# Altium PCB F_300.PcbDoc (part 1 of 3)
Units mil, origin at the board's own origin, x right, y up, seen from the top; angles counter-clockwise.
Board outline 3770 x 3800 mil, 4 copper layers (Top Layer, DGND, VCC, Bottom Layer), stack 30.634 mil thick; 207 components, 290 nets, 1124 pads, 648 vias.
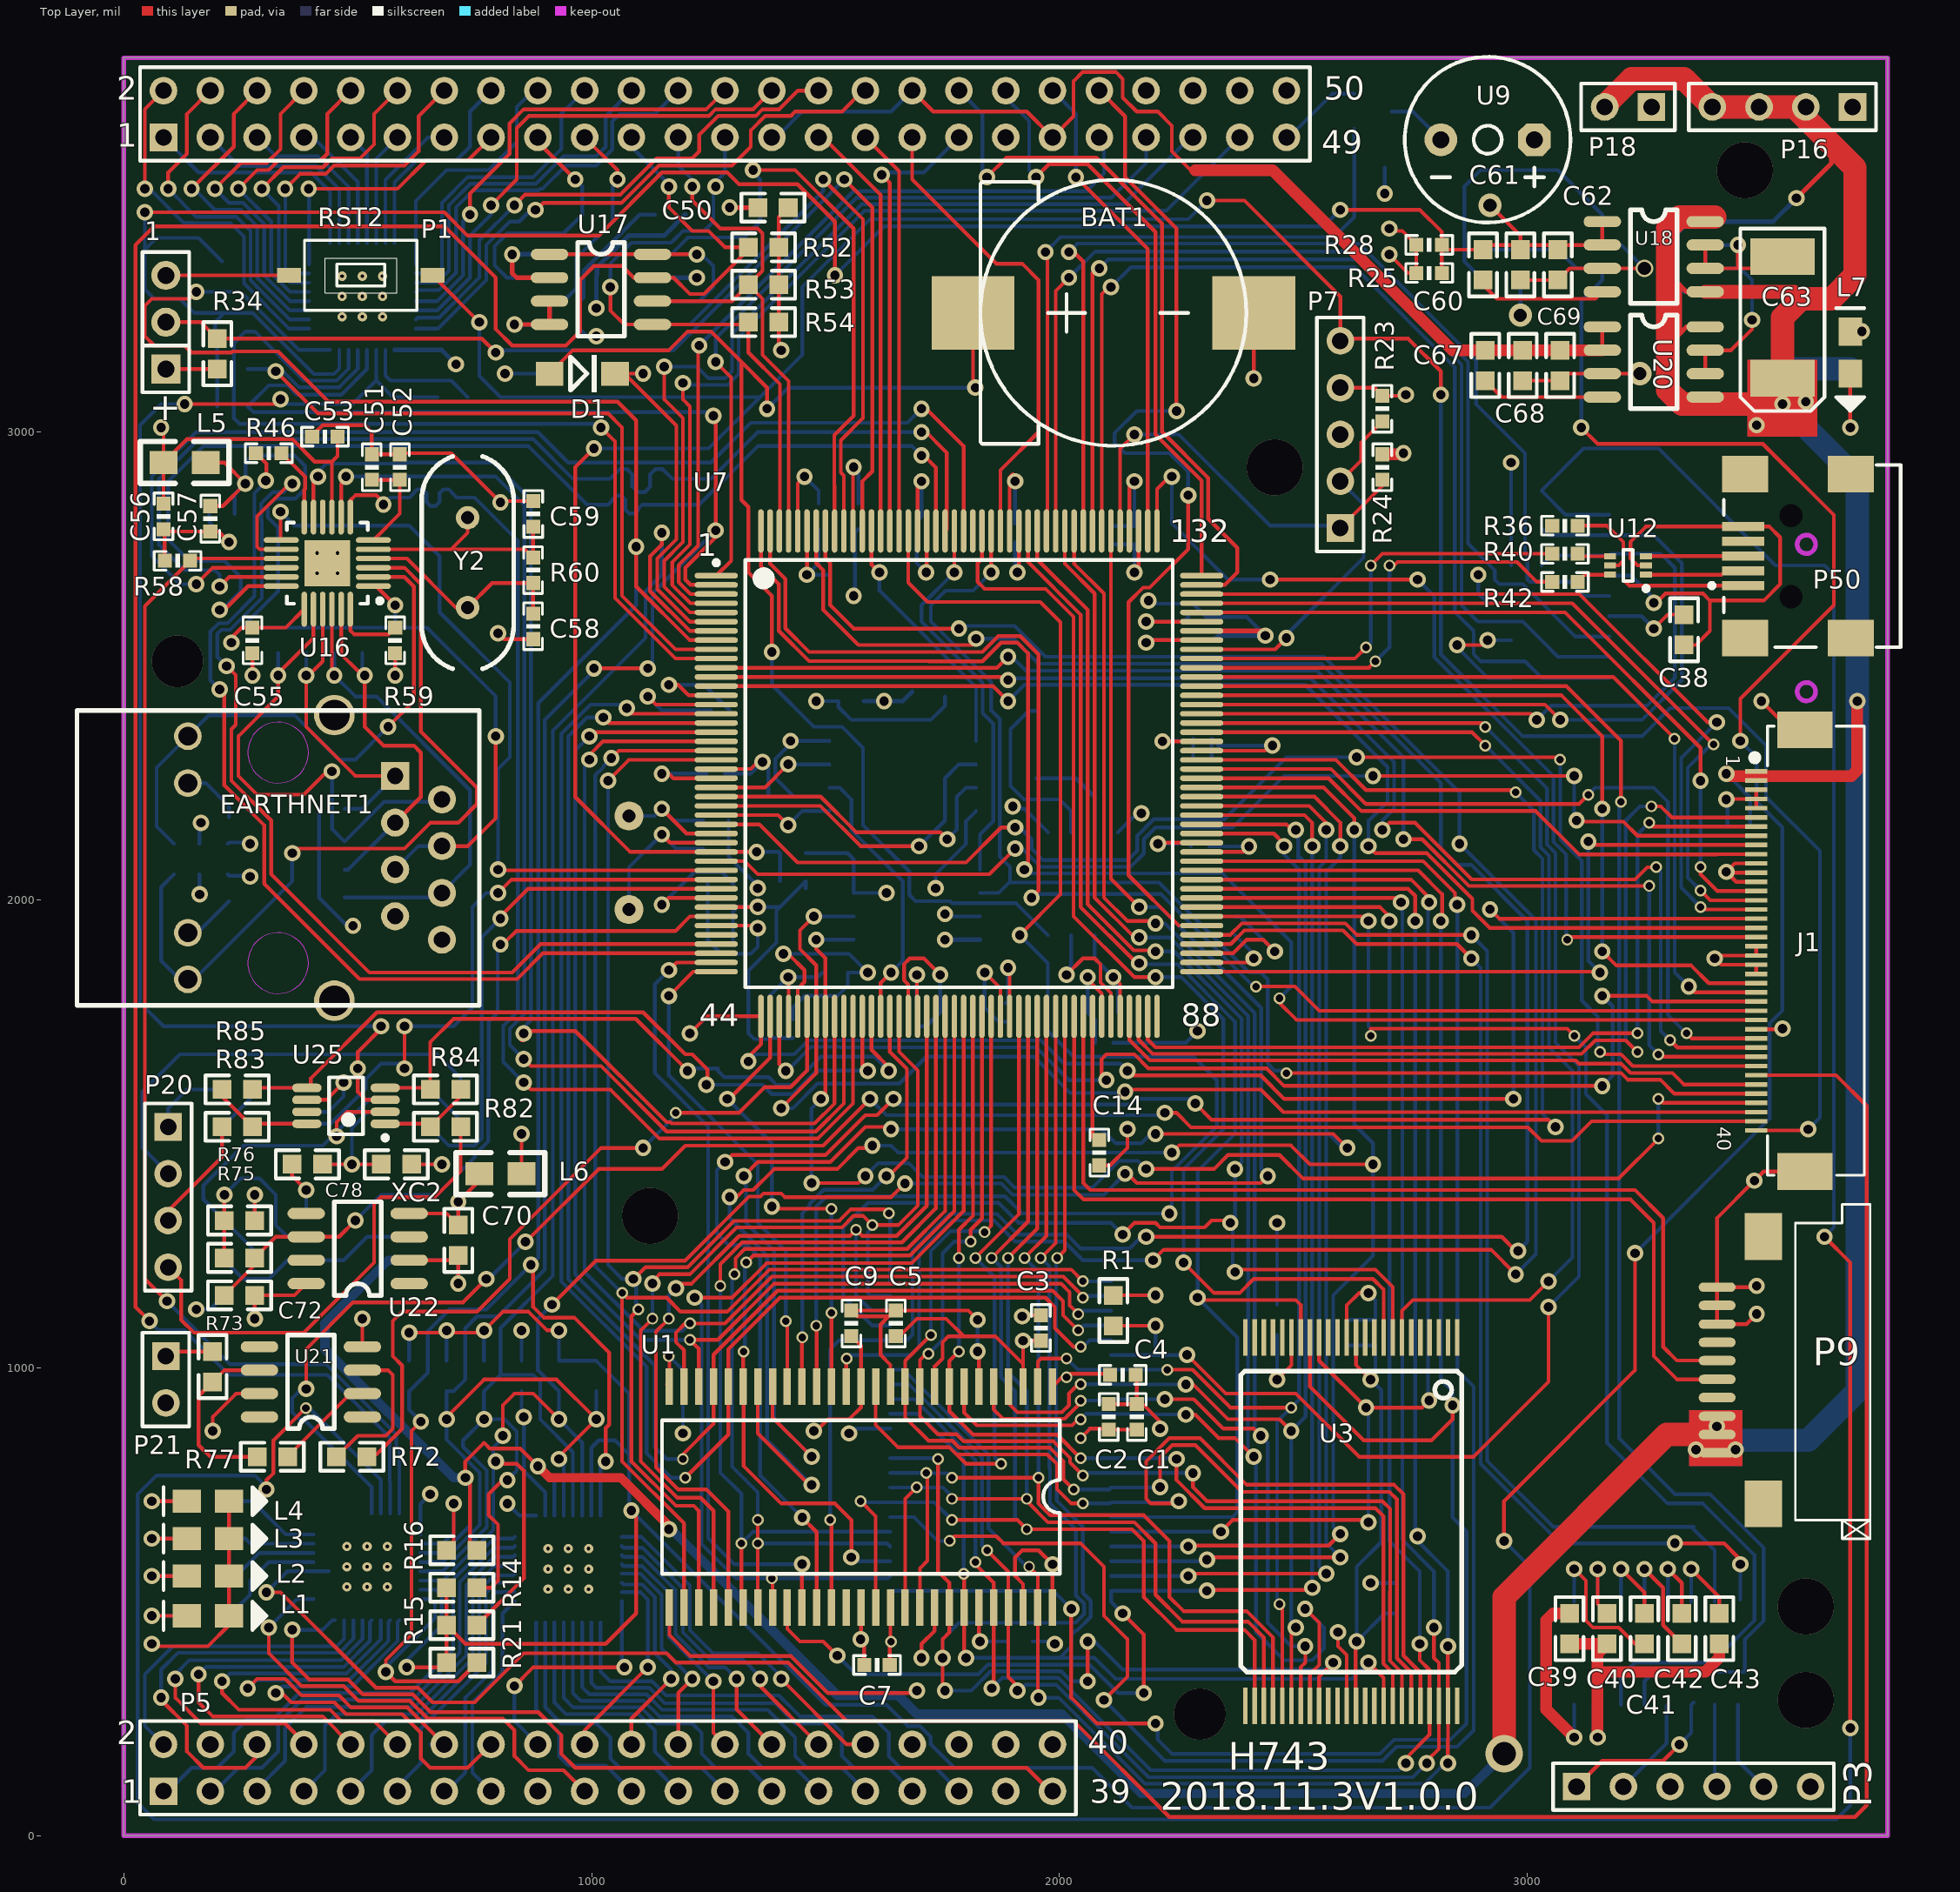
[diagram p0: Top Layer view]
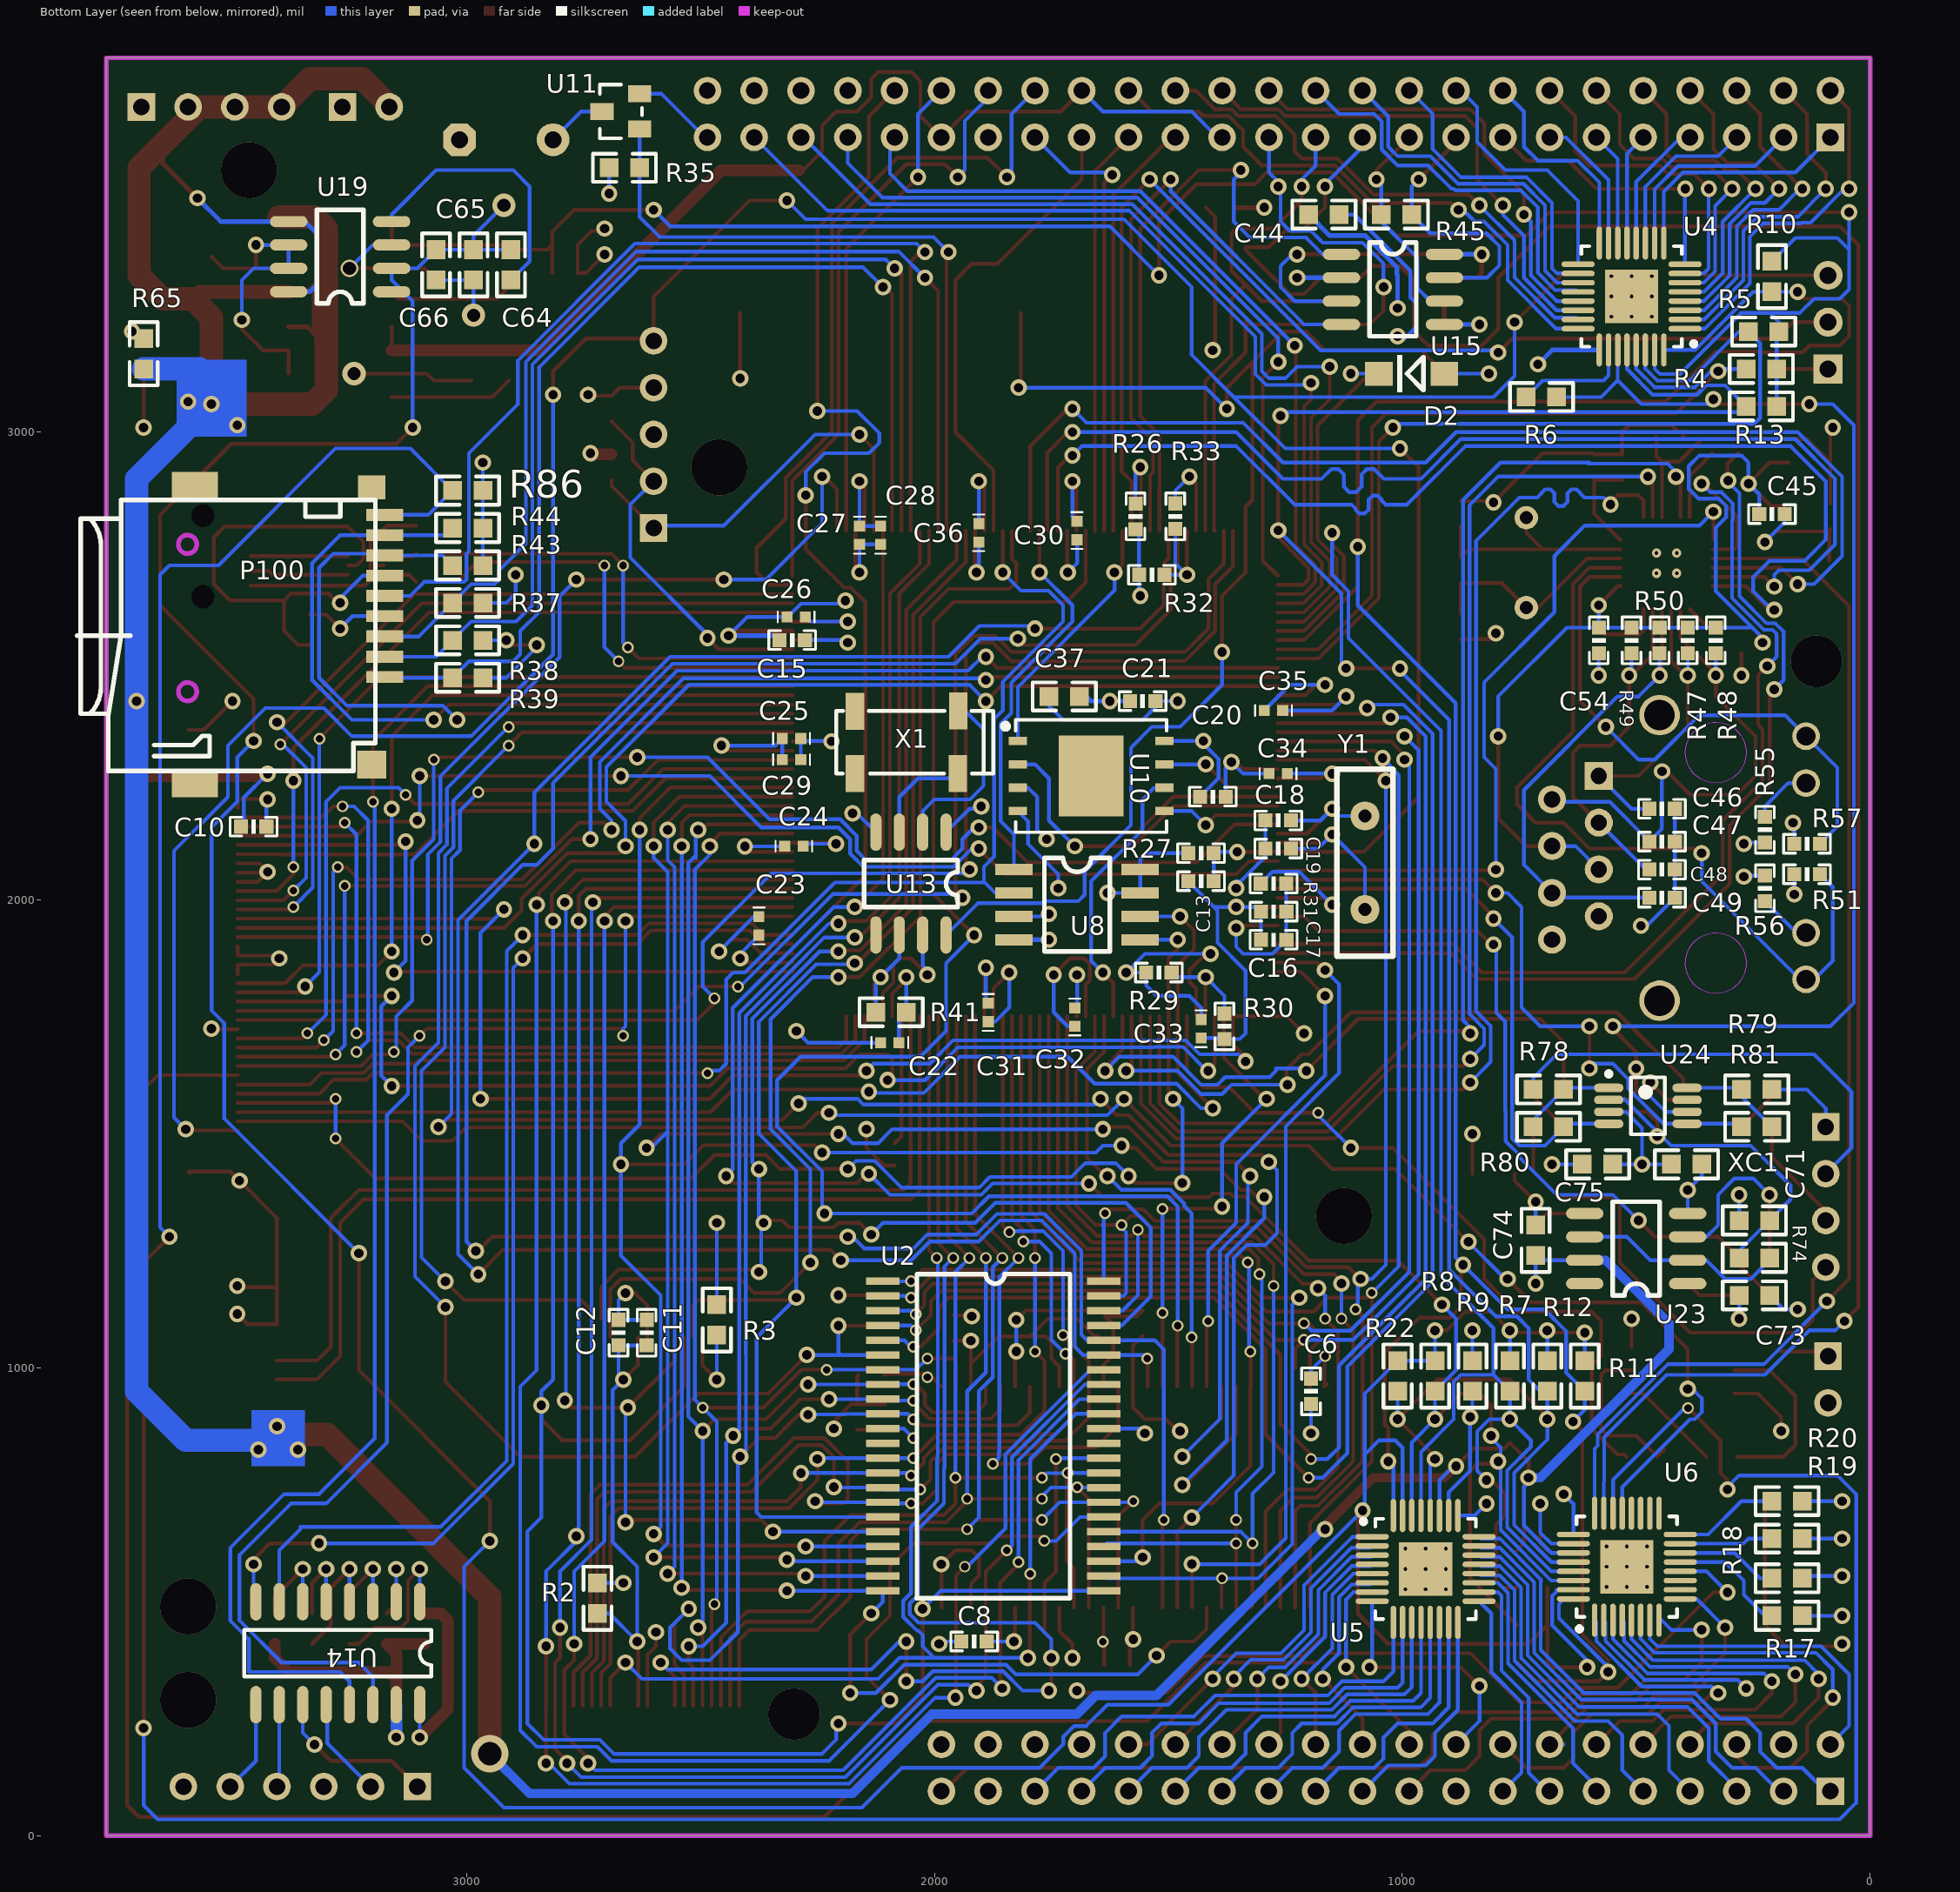
[diagram p1: Bottom Layer view, seen from below]
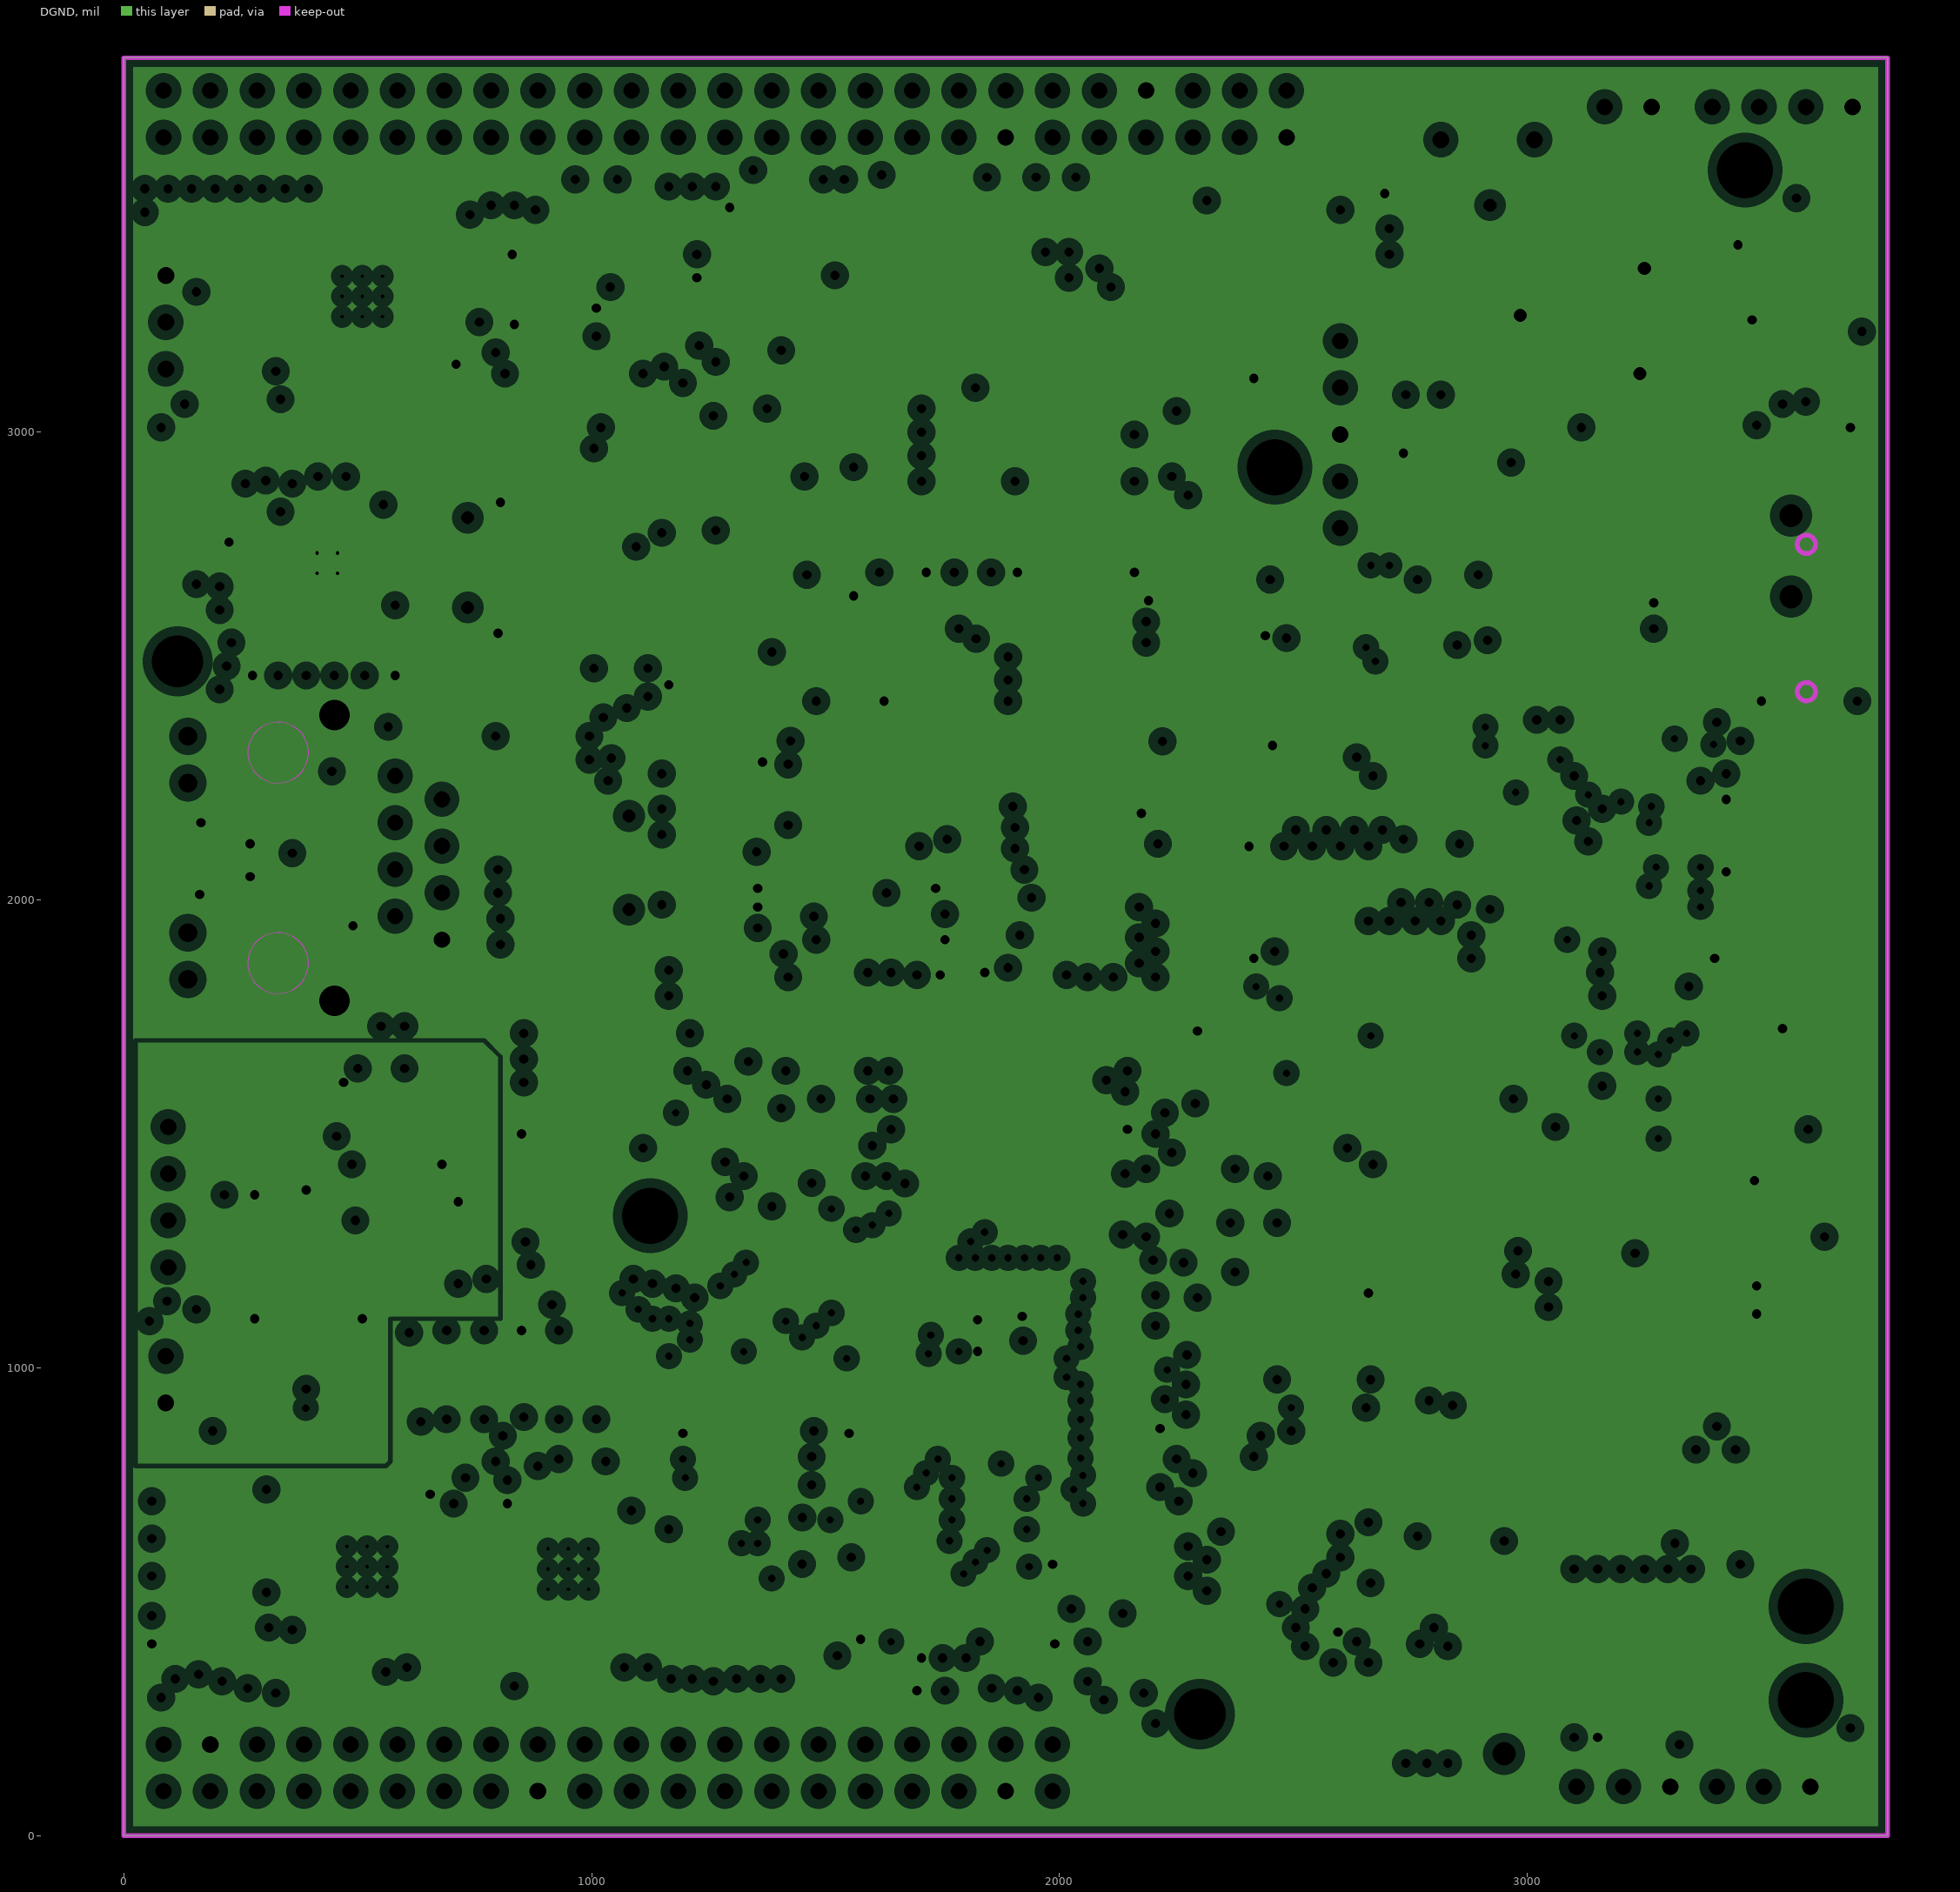
[diagram p2: DGND, clearances drawn from the general rule]
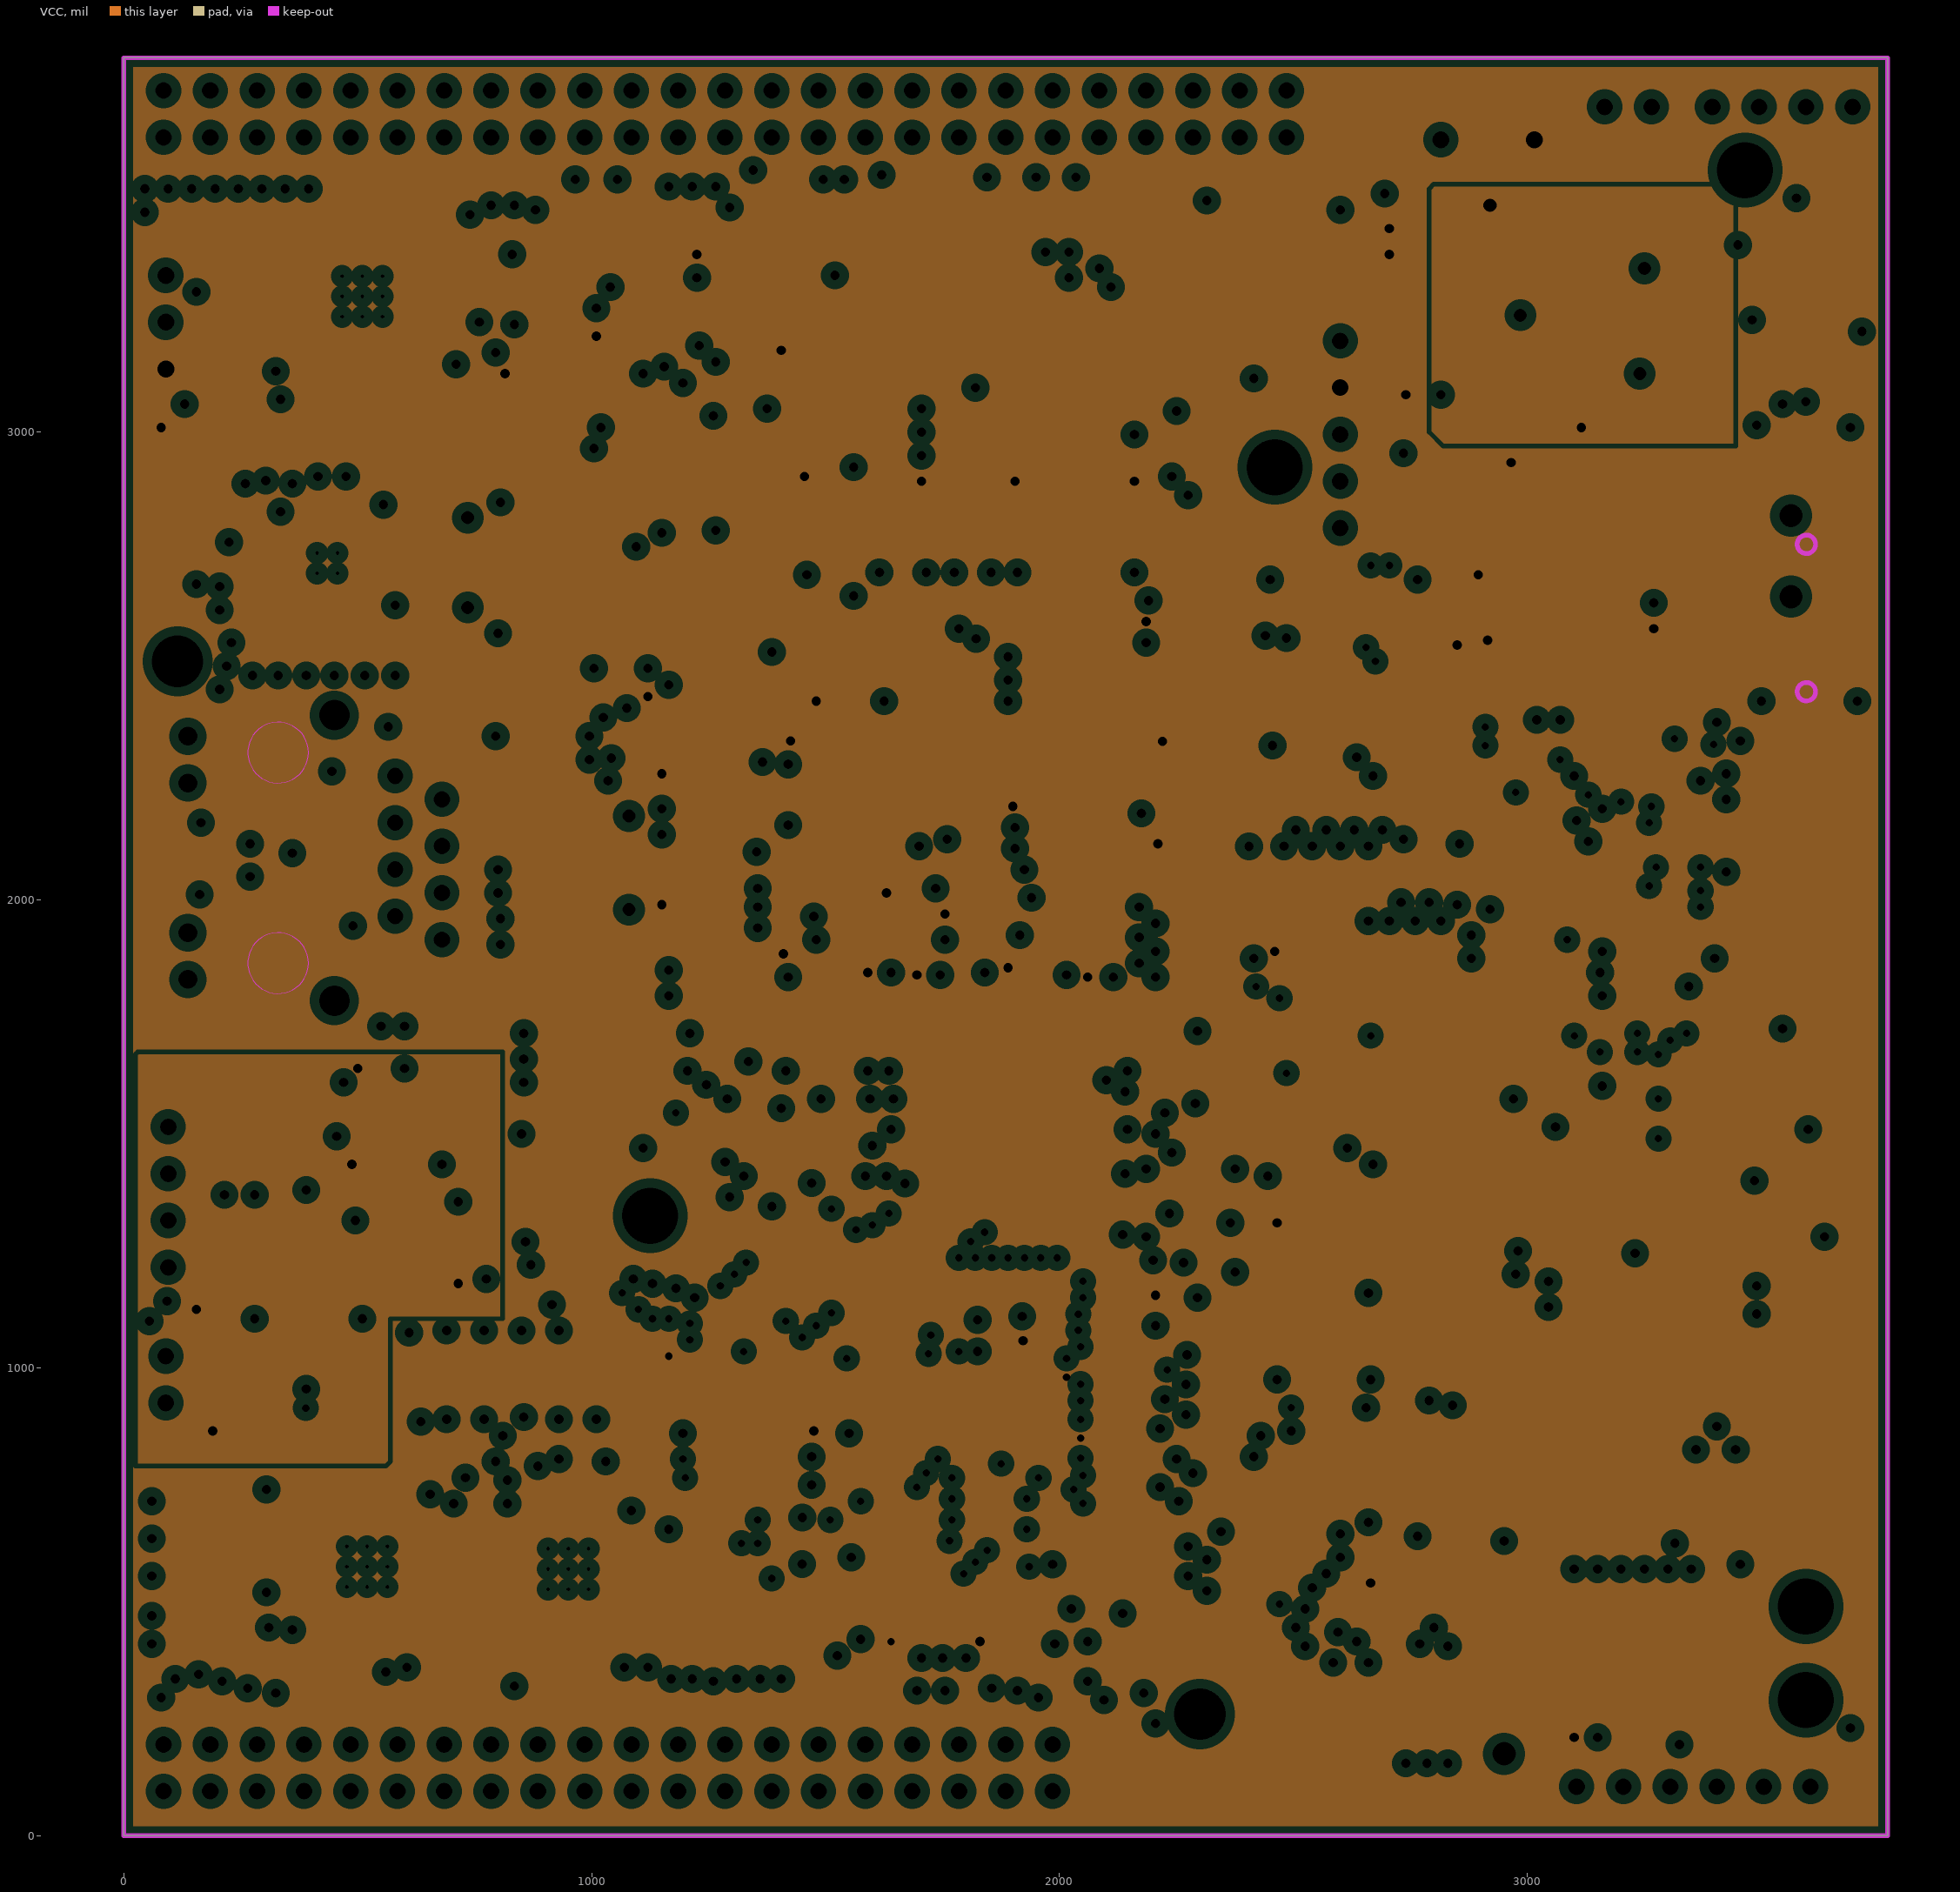
[diagram p3: VCC, clearances drawn from the general rule]

## Layer stack, top to bottom
Top Solder: solder mask 0.4, Solder Resist, Dk 3.5
Top Layer: signal copper 1.4
Dielectric 1: core 10, FR-4, Dk 4.2
DGND: plane copper 1.417, net (Multiple Nets)
Dielectric 2: core 10, Dk 4.2
VCC: plane copper 1.417, net (Multiple Nets)
Dielectric 3: prepreg 5, Dk 4.2
Bottom Layer: signal copper 1.4
Bottom Solder: solder mask 0.4, Solder Resist, Dk 3.5

## Board outline
0,0 0,3800 3770,3800 3770,0

## Design rules (kind name [scope] priority, off if disabled: settings)
Clearance [All] p1: gap=6 ignorepadtopadclearanceinfootprint=FALSE except(0: Arc-Hole Track-Hole SMDPad-Hole THPad-Hole Via-Hole Fill-Hole Poly-Hole Region-Hole Text-Hole)
DiffPairsRouting [All] p1: maxlimit=10 minlimit=10 mostfreqgap=10 toplayer_minwidth=10 toplayer_maxwidth=15 toplayer_prefwidth=15 bottomlayer_minwidth=10 bottomlayer_maxwidth=15 bottomlayer_prefwidth=15 maxuncoupledlength=500
HoleToHoleClearance [All] p1: gap=4 allowstackedmicrovias=TRUE
Length "InNet('PC4') Or InNet('PG13')" [InNet('PC4') Or InNet('PG13')] p1: maxlimit=2800 minlimit=0
Length "InNet('PG14') Or InNet('PG13')" [InNet('PG14') Or InNet('PG13')] p2: maxlimit=2458.94 minlimit=0
MinimumSolderMaskSliver [All] p1: minsoldermaskwidth=0
PlaneClearance [All] p1: clearance=20
PlaneConnect [All] p1: planeconnectstyle=Relief reliefexpansion=20 reliefentries=4 reliefconductorwidth=10 reliefairgap=10
PolygonConnect [All] p1: connectstyle=Relief reliefconductorwidth=10 reliefentries=4 polygonreliefangle="90 Angle" airgapwidth=10
RoutingVias [All] p1: holewidth=28 width=50 viastyle="Through Hole" minholewidth=15 minwidth=20 maxholewidth=28 maxwidth=50
SilkToSilkClearance [All] p1: silktosilkclearance=0
SilkToSolderMaskClearance [IsPad] p1: minsilkscreentomaskgap=0 clearancetoexposedcopper=TRUE
SolderMaskExpansion [All] p1: expansion=4
Width [All] p1: maxlimit=50 minlimit=8 preferedwidth=10 minimp=50.000000 maximp=50.000000 favimp=50.000000
23 further rules are at their usual default settings.

## Classes and differential pairs
net class "New Class 1": PC4 PC5
net class "New Class": PG13 PG14
component class Power: C60 C61 C62 C63 C64 C65 C66 C67 C68 C69 C70 C71 C72 C73 C74 C75 C78 L6 L7 P16 P18 P20 P21 R65 R72 R73 R74 R75 R76 R77 R78 R79 R80 R81 R82 R83 R84 R85 U18 U19 U20 U21 U22 U23 U24 U25 XC1 XC2
component class MCU_Per: BAT1 C37 C38 C39 C40 C41 C42 C43 C44 C45 C46 C47 C48 C49 C50 C51 C52 C53 C54 C55 C56 C57 C58 C59 EARTHNET1 L5 P3 P9 P50 P100 P? R36 R37 R38 R39 R40 R41 R42 R43 R44 R45 R46 R47 R48 R49 R50 R51 R52 R53 R54 R55 R56 R57 R58 R59 R60 R86 U12 U13 U14 U15 U16 U17 X1 Y2
component class MCU_H: 1 C13 C14 C15 C16 C17 C18 C19 C20 C21 C22 C23 C24 C25 C26 C27 C28 C29 C30 C31 C32 C33 C34 C35 C36 D1 D2 P7 R23 R24 R25 R26 R27 R28 R29 R30 R31 R32 R33 R34 R35 RST2 U7 U8 U9 U10 U11 Y1
component class IO_IIC: L1 L2 L3 L4 P1 P5 R4 R5 R6 R7 R8 R9 R10 R11 R12 R13 R14 R15 R16 R17 R18 R19 R20 R21 R22 U4 U5 U6
component class FLASH_SRAM: C1 C2 C3 C4 C5 C6 C7 C8 C9 C10 C11 C12 J1 R1 R2 R3 U1 U2 U3

## Components (designator, comment, footprint, x,y, rotation, side; value= is the part's Value field where it differs from the comment)
1 "CON3" SIP3 90,3135 r90 top
BAT1 "BAT3.6V" BAT 1815,3255 r0 top
C1 "0.1uF" 0603P 2165,895 r90 top
C2 "0.1uF" 0603P 2105,895 r90 top
C3 "0.1uF" 0603P 1960,1085 r90 top
C4 "0.1uF" 0603P 2135,985 r0 top
C5 "0.1uF" 0603P 1650,1095 r90 top
C6 "0.1uF" 0603P 1195,950 r270 bottom
C7 "0.1uF" 0603P 1610,365 r180 top
C8 "0.1uF" 0603P 1915,415 r0 bottom
C9 "0.1uF" 0603P 1555,1095 r90 top
C10 "0.1uF" 0603P 3455,2156.89 r180 bottom
C11 "0.1uF" 0603P 2615,1075 r90 bottom
C12 "0.1uF" 0603P 2675,1075 r90 bottom
C13 "0.1uF" 0603P 1430,2040 r0 bottom
C14 "0.1uF" 0603P 2085,1460 r270 top
C15 "0.1uF" 0603P 2303.7,2555.43 r0 bottom
C16 "10uF" 0603P 1275,1915 r180 bottom
C17 "0.1uF" 0603P 1275,1975 r180 bottom
C18 "8pF" 0603P 1265,2170 r0 bottom
C19 "8pF" 0603P 1265,2110 r0 bottom
C20 "0.1uF" 0603P 1405,2220.79 r180 bottom
C21 "0.1uF" 0603P 1555,2425 r180 bottom
C22 "0.1uF" 0402 2115,1695 r180 bottom
C23 "0.1uF" 0402 2375,1925 r90 bottom
C24 "0.1uF" 0402 2320,2115 r180 bottom
C25 "0.1uF" 0402 2325,2345 r180 bottom
C26 "0.1uF" 0402 2315,2605 r180 bottom
C27 "0.1uF" 0402 2160,2760 r90 bottom
C28 "0.1uF" 0402 2115,2760 r90 bottom
C29 "0.1uF" 0402 2325,2300 r180 bottom
C30 "0.1uF" 0402 1695,2770 r90 bottom
C31 "0.1uF" 0402 1885,1740 r90 bottom
C32 "0.1uF" 0402 1700,1730 r90 bottom
C33 "0.1uF" 0402 1430,1705 r90 bottom
C34 "0.1uF" 0402 1285,2270 r180 bottom
C35 "0.1uF" 0402 1295,2405 r180 bottom
C36 "0.1uF" 0402 1905,2765 r90 bottom
C37 "104" 0603 1690,2435 r0 bottom
C38 "104" 0603 3335,2545 r90 top
C39 "104" 0603 3090,410 r90 top
C40 "104" 0603 3170,410 r90 top
C41 "104" 0603 3250,410 r90 top
C42 "104" 0603 3330,410 r90 top
C43 "104" 0603 3410,475 r270 top
C44 "0.1uF" 0603 1200,3465 r180 bottom
C45 "223" 0603P 210,2825 r180 bottom
C46 "0.1uf" 0603P 445,2195 r180 bottom
C47 "0.1uf" 0603P 445,2125 r180 bottom
C48 "0.1uf" 0603P 445,2065 r180 bottom
C49 "0.1uf" 0603P 445,2005 r180 bottom
C50 "104" 0603 1420,3480 r180 top
C51 "0.1uf" 0603P 530,2925 r90 top
C52 "10uf" 0603P 590,2925 r90 top
C53 "0.1uf" 0603P 430,2990 r180 top
C54 "0.1uf" 0603P 579.87,2555 r270 bottom
C55 "0.1uf" 0603P 275,2555 r270 top
C56 "223" 0603P 85,2820 r270 top
C57 "223" 0603P 185,2815 r270 top
C58 "22pF" 0603P 875,2585 r270 top
C59 "22pF" 0603P 875,2825 r90 top
C60 "103" 0603 2905,3390 r270 top
C61 "10uF" 0603 2985,3390 r270 top
C62 "104" 0603 3065,3390 r270 top
C63 "100uF" 100UF/25V_CA 3545,3115 r90 top
C64 "103" 0603 2905,3390 r270 bottom
C65 "10uF" 0603 2985,3390 r270 bottom
C66 "104" 0603 3065,3390 r270 bottom
C67 "103" 0603 2910,3175 r270 top
C68 "10uF" 0603 2990,3175 r270 top
C69 "104" 0603 3070,3175 r270 top
C70 "10uF" 0603 715,1240 r90 top
C71 "104" 0603 215,1315 r0 bottom
C72 "104" 0603 280,1155 r180 top
C73 "10uF" 0603 280,1155 r180 bottom
C74 "104" 0603 715,1305 r270 bottom
C75 "0.1uF" 0603 615,1435 r180 bottom
C78 "0.1uF" 0603 360,1435 r0 top
D1 "1N4148" DIODE_SOP 910,3125 r0 top
D2 "1N4148" DIODE_SOP 910,3125 r0 bottom
EARTHNET1 "HR911105" HR911105A 330,2090 r90 top
J1 "RGBLCD" FPC-TOP40 3485,2275 r270 top
L1 "LED" 0805LED 135,470 r0 top
L2 "LED" 0805LED 135,555 r0 top
L3 "LED" 0805LED 135,635 r0 top
L4 "LED" 0805LED 135,715 r0 top
L5 "Inductor" 0805 85,2935 r0 top
L6 "Inductor" 0805 760,1415 r0 top
L7 "LED" 0805LED 3690,3215 r270 top
P1 "Header 25X2" HDR2X25 85,3630 r0 top
P3 "Header 13" HDR1X6 3105,105 r0 top
P5 "Header 20X2" HDR2X20 85,95 r0 top
P7 "JTAG" HDR1X5 2600,2795 r90 top
P9 "Header 10" PCBComponent_1 3455,995 r90 top
P16 "Header 4" HDR1X4 3695,3695 r180 top
P18 "Header 2" HDR1X2 3265,3695 r180 top
P20 "Header 4" HDR1X4 95,1515 r270 top
P21 "Header 2" HDR1X2 90,1025 r270 top
P50 "USB-B(Mini)" USB/SM0.8-6H5 3770,2735 r0 top
P100 "Header 13" SD-SMT 3175,2476.69 r90 bottom
R1 "390" 0603 2115,1090 r90 top
R2 "0R" 0603 2720,540 r270 bottom
R3 "10k" 0603 2465,1135 r270 bottom
R4 "1K" 0603 265,3135 r180 bottom
R5 "1K" 0603 260,3215 r180 bottom
R6 "1K" 0603 735,3075 r180 bottom
R7 "1K" 0603 770,950 r90 bottom
R8 "1K" 0603 930,950 r90 bottom
R9 "1K" 0603 850,950 r90 bottom
R10 "1K" 0603 210,3300 r90 bottom
R11 "1K" 0603 610,950 r90 bottom
R12 "1K" 0603 690,950 r90 bottom
R13 "1K" 0603 200,3055 r0 bottom
R14 "1K" 0603 755,530 r180 top
R15 "1K" 0603 755,450 r180 top
R16 "1K" 0603 690,610 r0 top
R17 "1K" 0603 145,470 r0 bottom
R18 "1K" 0603 145,550 r0 bottom
R19 "1K" 0603 145,635 r0 bottom
R20 "1K" 0603 145,715 r0 bottom
R21 "1K" 0603 755,370 r180 top
R22 "1K" 0603 1010,950 r90 bottom
R23 "10k" 0603P 2690,3050 r90 top
R24 "10k" 0603P 2690,2925 r90 top
R25 "0R" 0603P 2790,3340 r180 top
R26 "10k" 0603P 1570,2820 r270 bottom
R27 "10k" 0603P 1430,2100 r0 bottom
R28 "0R" 0603P 2790,3400 r180 top
R29 "10k" 0603P 1520,1845 r0 bottom
R30 "10k" 0603P 1380,1730 r270 bottom
R31 "10" 0603P 1275,2035 r0 bottom
R32 "0R" 0603P 1535,2695 r0 bottom
R33 "0R" 0603P 1485,2820 r90 bottom
R34 "5.1K" 0603 200,3200 r270 top
R35 "1M" 0603 2695,3565 r180 bottom
R36 "0R" 0603P 3080,2800 r0 top
R37 "100k" 0603 2965,2635 r0 bottom
R38 "100k" 0603 2965,2555 r0 bottom
R39 "100k" 0603 2965,2475 r0 bottom
R40 "10K" 0603P 3080,2740 r0 top
R41 "5.1K" 0603 2125,1760 r180 bottom
R42 "10K" 0603P 3080,2680 r0 top
R43 "100k" 0603 3030,2715 r180 bottom
R44 "100k" 0603 3030,2795 r180 bottom
R45 "120R" 0603 980,3465 r0 bottom
R46 "510R" 0603P 310,2955 r180 top
R47 "49.9R" 0603P 390,2555 r270 bottom
R48 "49.9R" 0603P 330,2555 r270 bottom
R49 "49.9R" 0603P 510,2555 r270 bottom
R50 "49.9R" 0603P 450,2555 r270 bottom
R51 "49.9R" 0603P 135,2055 r180 bottom
R52 "5.1K" 0603 1335,3395 r0 top
R53 "5.1K" 0603 1335,3315 r0 top
R54 "5.1K" 0603 1335,3235 r0 top
R55 "510R" 0603P 225,2150 r90 bottom
R56 "510R" 0603P 225,2025 r270 bottom
R57 "49.9R" 0603P 135,2120 r180 bottom
R58 "10k" 0603P 115,2725 r180 top
R59 "12.1k" 0603P 580,2555 r270 top
R60 "1M" 0603P 875,2705 r270 top
R65 "5.1K" 0603 3690,3135 r90 bottom
R72 "1K" 0603 455,810 r0 top
R73 "1K" 0603 190,1035 r270 top
R74 "1k0.1" 0603 215,1235 r0 bottom
R75 "1k0.1" 0603 280,1235 r180 top
R76 "1k0.1" 0603 280,1315 r180 top
R77 "0R" 0603 285,810 r0 top
R78 "1k0.1" 0603 655,1595 r0 bottom
R79 "1k0.1" 0603 275,1595 r180 bottom
R80 "1k0.1" 0603 655,1515 r0 bottom
R81 "1k0.1" 0603 210,1515 r0 bottom
R82 "1k0.1" 0603 655,1515 r0 top
R83 "1k0.1" 0603 275,1515 r180 top
R84 "1k0.1" 0603 655,1595 r0 top
R85 "1k0.1" 0603 210,1595 r0 top
R86 "100k" 0603 3030,2875 r180 bottom
RST2 "KEY_M" KEY_SOP3625 660,3335 r180 top
U1 "W9825G6KH" TSOP54 1985,960 r270 top
U2 "IS62WV51216" TSOP44 2110,1185 r180 bottom
U3 "MT29F4G08" TSOP48 2850,1065 r270 top
U4 "TCA6424ARGJR" TCA6424A-QFN32 1880,4660 r0 bottom
U5 "TCA6424ARGJR" TCA6424A-QFN32 -420,-800 r180 bottom
U6 "TCA6424ARGJR" TCA6424A-QFN32 -850,1945 r90 bottom
U7 "STM32H743IIT6" STM32h743IIGT-NEW-LQFN-176N 1785,2270 r0 top
U8 "W25X16" SOIC-8 1830,2065 r180 bottom
U9 "BZ" BZ_SMALL 2915,3625 r90 top
U10 "W25Q256" WSON8 1665,2265 r180 bottom
U11 "SI2306" SOT-23 2710,3685 r90 bottom
U12 "NUF2042XV6" NUF2042XV6 3215,2715 r180 top
U13 "DS1302" SO-8 1975,2145 r270 bottom
U14 "MAX3232" SO-16 3100,500 r270 bottom
U15 "MAX3051" SO-8 1130,3380 r180 bottom
U16 "LAN8720A" LAN7820A-QFN24 435,2720 r180 top
U17 "FM24C64" SO-8 910,3380 r0 top
U18 "LTC1763" SO-8 3160,3450 r0 top
U19 "LTC1763" SO-8 3160,3300 r0 bottom
U20 "LTC1763" SO-8 3160,3225 r0 top
U21 "OP177" SO-8 510,895 r180 top
U22 "AD780" SO-8 610,1180 r180 top
U23 "OP177" SO-8 390,1180 r0 bottom
U24 "LTC6362" LT6350XIN 475,1560 r180 bottom
U25 "LTC6362" LT6350XIN 475,1560 r180 top
X1 "32K" XTAL-2 1950,2270 r0 bottom
XC1 "10uF" 0603 425,1435 r180 bottom
XC2 "10uF" 0603 550,1435 r0 top
Y1 "XTAL" XTAL1 1080,2180 r270 bottom
Y2 "25MHz" XTAL_US 735,2625 r90 top

## Footprints (in the part's own frame and the unit in brackets; to place one, negate y for a bottom-side part, rotate by r counter-clockwise, add the part's x,y. Pads: shape width x height; smd on the part's side, far side on the other; paste and mask are expansions set on the pad)
100UF/25V_CA [mm]
  rect 2x3.5 smd: 1(0,0) 2(6.604,0)
  silkscreen extent -1.78,-2.29 8.13,2.29
0402 [mm]
  rect 0.6x0.6 smd: 1(0,0) 2(1,0)
  silkscreen extent -0.5,-0.3 1.5,0.3
0603 [mil]
  rect 40x40 smd: 1(0,0) 2(65,0)
  silkscreen extent -35,-30 100,30
0603P [mil]
  rect 30x30 smd: 1(-27,0) 2(27.5,-0.06)
  silkscreen extent -50,-20 50,20
0805 [mil]
  rect 60x50 smd: 1(0,0) 2(90,0)
  silkscreen extent -50,-45 140,45
0805LED [mil]
  rect 60x50 smd: 1(0,0) 2(90,0)
  silkscreen extent -50,-30 170,30
BAT [mm]
  rect 4.5x4 smd: 1(0,0) 2(15.24,0)
  silkscreen extent 0.4,-7.22 14.84,7.22
BZ_SMALL [mil]
  oct 70x70 hole 36: 1(0,-100)
  round 70 hole 36: 2(0,100)
  silkscreen extent -177,-177 177,177
DIODE_SOP [mm]
  rect 1.5x1.3 smd: 1(0,0) 2(3.556,0)
  silkscreen extent 1.14,-1.02 2.56,1.02
FPC-TOP40 [mm]
  rect 0.25x1.2 smd: 1(0,0.102) 2(0.5,0.102) 3(1,0.102) 4(1.5,0.102) 5(2,0.102) 6(2.5,0.102) 7(3,0.102) 8(3.5,0.102) 9(4,0.102) 10(4.5,0.102) 11(5,0.102) 12(5.5,0.102) 13(6,0.102) 14(6.5,0.102) 15(7,0.102) 16(7.5,0.102) 17(8,0.102) 18(8.5,0.102) 19(9,0.102) 20(9.5,0.102) 21(10,0.102) 22(10.5,0.102) 23(11,0.102) 24(11.5,0.102) 25(12,0.102) 26(12.5,0.102) 27(13,0.102) 28(13.5,0.102) 29(14,0.102) 30(14.5,0.102) 31(15,0.102) 32(15.5,0.102) 33(16,0.102) 34(16.5,0.102) 35(17,0.102) 36(17.5,0.102) 37(18,0.102) 38(18.5,0.102) 39(19,0.102) 40(19.5,0.102)
  rect 2x3 smd: A(-2.25,2.754) B(21.725,2.754)
  silkscreen extent -2.45,-0.15 21.92,5.97
HDR1X2 [mm] "Connector; Header; 2 Position"
  rect 1.5x1.5 hole 0.9: 1(0,0)
  round 1.5 hole 0.9: 2(2.54,0)
  silkscreen extent -1.27,-1.27 3.81,1.27
HDR1X4 [mm] "Connector; Header; 4 Position"
  rect 1.5x1.5 hole 0.9: 1(0,0)
  round 1.5 hole 0.9: 2(2.54,0) 3(5.08,0) 4(7.62,0)
  silkscreen extent -1.27,-1.27 8.89,1.27
HDR1X5 [mm] "Connector; Header; 5 Position"
  rect 1.5x1.5 hole 0.9: 1(0,0)
  round 1.5 hole 0.9: 2(2.54,0) 3(5.08,0) 4(7.62,0) 5(10.16,0)
  silkscreen extent -1.27,-1.27 11.43,1.27
HDR1X6 [mm] "Connector; Header; 6 Position"
  rect 1.5x1.5 hole 0.9: 1(0,0)
  round 1.5 hole 0.9: 2(2.54,0) 3(5.08,0) 4(7.62,0) 5(10.16,0) 6(12.7,0)
  silkscreen extent -1.27,-1.27 13.97,1.27
HDR2X20 [mm] "Connector; Header; 20x2 Position"
  rect 1.5x1.5 hole 0.9: 1(0,0)
  round 1.5 hole 0.9: 2(0,2.54) 3(2.54,0) 4(2.54,2.54) 5(5.08,0) 6(5.08,2.54) 7(7.62,0) 8(7.62,2.54) 9(10.16,0) 10(10.16,2.54) 11(12.7,0) 12(12.7,2.54) 13(15.24,0) 14(15.24,2.54) 15(17.78,0) 16(17.78,2.54) 17(20.32,0) 18(20.32,2.54) 19(22.86,0) 20(22.86,2.54) 21(25.4,0) 22(25.4,2.54) 23(27.94,0) 24(27.94,2.54) 25(30.48,0) 26(30.48,2.54) 27(33.02,0) 28(33.02,2.54) 29(35.56,0) 30(35.56,2.54) 31(38.1,0) 32(38.1,2.54) 33(40.64,0) 34(40.64,2.54) 35(43.18,0) 36(43.18,2.54) 37(45.72,0) 38(45.72,2.54) 39(48.26,0) 40(48.26,2.54)
  silkscreen extent -1.27,-1.27 49.53,3.81
HDR2X25 [mm] "Connector; Header; 25x2 Position"
  rect 1.5x1.5 hole 0.9: 1(0,0)
  round 1.5 hole 0.9: 2(0,2.54) 3(2.54,0) 4(2.54,2.54) 5(5.08,0) 6(5.08,2.54) 7(7.62,0) 8(7.62,2.54) 9(10.16,0) 10(10.16,2.54) 11(12.7,0) 12(12.7,2.54) 13(15.24,0) 14(15.24,2.54) 15(17.78,0) 16(17.78,2.54) 17(20.32,0) 18(20.32,2.54) 19(22.86,0) 20(22.86,2.54) 21(25.4,0) 22(25.4,2.54) 23(27.94,0) 24(27.94,2.54) 25(30.48,0) 26(30.48,2.54) 27(33.02,0) 28(33.02,2.54) 29(35.56,0) 30(35.56,2.54) 31(38.1,0) 32(38.1,2.54) 33(40.64,0) 34(40.64,2.54) 35(43.18,0) 36(43.18,2.54) 37(45.72,0) 38(45.72,2.54) 39(48.26,0) 40(48.26,2.54) 41(50.8,0) 42(50.8,2.54) 43(53.34,0) 44(53.34,2.54) 45(55.88,0) 46(55.88,2.54) 47(58.42,0) 48(58.42,2.54) 49(60.96,0) 50(60.96,2.54)
  silkscreen extent -1.27,-1.27 62.23,3.81
HR911105A [mm]
  rect 1.524x1.524 hole 0.889: 1(4.45,-6.35)
  round 1.524 hole 0.889: 2(3.18,-8.89) 3(1.91,-6.35) 4(0.64,-8.89) 5(-0.63,-6.35) 6(-1.9,-8.89) 7(-3.17,-6.35) 8(-4.44,-8.89)
  round 1.5 hole 1.02: 9(6.6,4.9) 10(4.064,4.9) 11(-4.064,4.9) 12(-6.6,4.9)
  round 2.2 hole 1.65: 13(7.75,-3.048) 14(-7.75,-3.048)
  Keep-Out Layer circle w0.051: c5.716,0 r1.65
  Keep-Out Layer circle w0.051: c-5.714,0 r1.65
  silkscreen extent -8,-10.92 8,10.92
KEY_SOP3625 [mm]
  rect 1.3x0.8 smd: 1(0,0) 2(7.8,0)
  silkscreen extent 0.85,-1.9 6.95,1.9
LAN7820A-QFN24 [mm] "QFN, 24-Leads, Body 4.00x4.00mm, Pitch 0.50mm, Thermal Pad 2.50x2.50mm, IPC Medium Density"
  oval 1.9x0.3 smd: 1(-2.5,1.25) 2(-2.5,0.75) 3(-2.5,0.25) 4(-2.5,-0.25) 5(-2.5,-0.75) 6(-2.5,-1.25) 13(2.5,-1.25) 14(2.5,-0.75) 15(2.5,-0.25) 16(2.5,0.25) 17(2.5,0.75) 18(2.5,1.25)
  oval 0.3x1.9 smd: 7(-1.25,-2.5) 8(-0.75,-2.5) 9(-0.25,-2.5) 10(0.25,-2.5) 11(0.75,-2.5) 12(1.25,-2.5) 19(1.25,2.5) 20(0.75,2.5) 21(0.25,2.5) 22(-0.25,2.5) 23(-0.75,2.5) 24(-1.25,2.5)
  rect 2.5x2.5 smd: 25(0,0)
  silkscreen extent -2.98,-2.2 2.2,2.2, body extent -2.05,-2.05 2.05,2.05, height 0.85
LT6350XIN [mm] "TSOP, 8-Leads, Body 3.00x3.00mm, Pitch 0.65mm, IPC Medium Density"
  oval 1.6x0.46 smd: 1(-2.125,0.975) 3(-2.125,-0.325) 4(-2.125,-0.975) 5(2.125,-0.975) 6(2.125,-0.325) 7(2.125,0.325) 8(2.125,0.975)
  oval 1.6x0.462 smd: 2(-2.125,0.325)
  silkscreen extent -2.25,-1.55 0.92,1.86, body extent -1.55,-1.55 1.55,1.55, height 1.1
NUF2042XV6 [mm] "SOT23, 6-Leads, Body 1.60x1.65mm, Pitch 0.50mm, IPC Medium Density"
  rect 0.65x0.32 smd: 1(-0.975,0.5) 2(-0.975,0) 3(-0.975,-0.5) 4(0.975,-0.5) 5(0.975,0) 6(0.975,0.5)
  silkscreen extent -1.1,-0.85 0.25,1.37, body extent -0.65,-0.85 0.65,0.85, height 0.6
PCBComponent_1 [mil]
  rect 100x80 smd: 0(-285.5,-49.5) 0(285.5,-49.5)
  oval 20x79 smd: 1(-176.5,49.5) 2(-137.5,49.5) 3(-98.5,49.5) 4(-58.5,49.5) 5(-19.5,49.5) 6(20.5,49.5) 7(59.5,49.5) 8(98.5,49.5) 9(138.5,49.5) 10(177.5,49.5)
  silkscreen extent -360,-278 354,-117
SD-SMT [mm]
  rect 0.65x2 smd: 1(0,0) 2(1.1,0) 3(2.2,0) 4(3.3,0) 5(4.4,0) 6(5.5,0) 7(6.6,0) 8(7.7,0) 9(8.8,0)
  rect 1.3x1.5 smd: 10(10.3,0.7)
  rect 1.5x2.5 smd: 11(10.37,10.3) 12(-5.77,10.3)
  rect 1.5x1.6 smd: 13(-4.76,0.7)
  Keep-Out Layer circle w0.254: c-0.8,10.7 r0.5
  Keep-Out Layer circle w0.254: c7.2,10.7 r0.5
  silkscreen extent -5.1,0.5 9.6,16.7
SIP3 [mil]
  rect 62x62 hole 36: 1(0,0)
  round 62 hole 36: 2(100,0) 3(200,0)
  silkscreen extent -50,-50 250,50
SO-8 [mil]
  oval 80x24 smd: 1(0,0) 2(0,-50) 3(0,-100) 4(0,-150) 5(220,-150) 6(220,-100) 7(220,-50) 8(220,0)
  silkscreen extent 60,-175 160,25
SO-16 [mil]
  oval 80x24 smd: 1(0,0) 2(0,-50) 3(0,-100) 4(0,-150) 5(0,-200) 6(0,-250) 7(0,-300) 8(0,-350) 9(220,-350) 10(220,-300) 11(220,-250) 12(220,-200) 13(220,-150) 14(220,-100) 15(220,-50) 16(220,0)
  silkscreen extent 60,-375 160,25
SOIC-8 [mil]
  rect 80x24 smd: 1(0,0) 2(0,-50.06) 3(0,-100.06) 4(0,-150.06) 5(270,-150) 6(270,-100) 7(270,-50) 8(270,0)
  silkscreen extent 65,-175 205,25
SOT-23 [mil]
  rect 36x50 smd: B(-37,-80) C(0,0) E(38,-80)
  silkscreen extent -57,-85 58,5
STM32h743IIGT-NEW-LQFN-176N [mm] "TSQFP, 176-Leads, Body 24.00x24.00mm, Pitch 0.50mm, IPC Medium Density"
  oval 2.35x0.3 smd: 1(-13.175,10.75) 2(-13.175,10.25) 3(-13.175,9.75) 4(-13.175,9.25) 5(-13.175,8.75) 6(-13.175,8.25) 7(-13.175,7.75) 8(-13.175,7.25) 9(-13.175,6.75) 10(-13.175,6.25) 11(-13.175,5.75) 12(-13.175,5.25) 13(-13.175,4.75) 14(-13.175,4.25) 15(-13.175,3.75) 16(-13.175,3.25) 17(-13.175,2.75) 18(-13.175,2.25) 19(-13.175,1.75) 20(-13.175,1.25) 21(-13.175,0.75) 22(-13.175,0.25) 23(-13.175,-0.25) 24(-13.175,-0.75) 25(-13.175,-1.25) 26(-13.175,-1.75) 27(-13.175,-2.25) 28(-13.175,-2.75) 29(-13.175,-3.25) 30(-13.175,-3.75) 31(-13.175,-4.25) 32(-13.175,-4.75) 33(-13.175,-5.25) 34(-13.175,-5.75) 35(-13.175,-6.25) 36(-13.175,-6.75) 37(-13.175,-7.25) 38(-13.175,-7.75) 39(-13.175,-8.25) 40(-13.175,-8.75) 41(-13.175,-9.25) 42(-13.175,-9.75) 43(-13.175,-10.25) 44(-13.175,-10.75) 89(13.175,-10.75) 90(13.175,-10.25) 91(13.175,-9.75) 92(13.175,-9.25) 93(13.175,-8.75) 94(13.175,-8.25) 95(13.175,-7.75) 96(13.175,-7.25) 97(13.175,-6.75) 98(13.175,-6.25) 99(13.175,-5.75) 100(13.175,-5.25) 101(13.175,-4.75) 102(13.175,-4.25) 103(13.175,-3.75) 104(13.175,-3.25) 105(13.175,-2.75) 106(13.175,-2.25) 107(13.175,-1.75) 108(13.175,-1.25) 109(13.175,-0.75) 110(13.175,-0.25) 111(13.175,0.25) 112(13.175,0.75) 113(13.175,1.25) 114(13.175,1.75) 115(13.175,2.25) 116(13.175,2.75) 117(13.175,3.25) 118(13.175,3.75) 119(13.175,4.25) 120(13.175,4.75) 121(13.175,5.25) 122(13.175,5.75) 123(13.175,6.25) 124(13.175,6.75) 125(13.175,7.25) 126(13.175,7.75) 127(13.175,8.25) 128(13.175,8.75) 129(13.175,9.25) 130(13.175,9.75) 131(13.175,10.25) 132(13.175,10.75)
  oval 0.3x2.35 smd: 45(-10.75,-13.175) 46(-10.25,-13.175) 47(-9.75,-13.175) 48(-9.25,-13.175) 49(-8.75,-13.175) 50(-8.25,-13.175) 51(-7.75,-13.175) 52(-7.25,-13.175) 53(-6.75,-13.175) 54(-6.25,-13.175) 55(-5.75,-13.175) 56(-5.25,-13.175) 57(-4.75,-13.175) 58(-4.25,-13.175) 59(-3.75,-13.175) 60(-3.25,-13.175) 61(-2.75,-13.175) 62(-2.25,-13.175) 63(-1.75,-13.175) 64(-1.25,-13.175) 65(-0.75,-13.175) 66(-0.25,-13.175) 67(0.25,-13.175) 68(0.75,-13.175) 69(1.25,-13.175) 70(1.75,-13.175) 71(2.25,-13.175) 72(2.75,-13.175) 73(3.25,-13.175) 74(3.75,-13.175) 75(4.25,-13.175) 76(4.75,-13.175) 77(5.25,-13.175) 78(5.75,-13.175) 79(6.25,-13.175) 80(6.75,-13.175) 81(7.25,-13.175) 82(7.75,-13.175) 83(8.25,-13.175) 84(8.75,-13.175) 85(9.25,-13.175) 86(9.75,-13.175) 87(10.25,-13.175) 88(10.75,-13.175) 133(10.75,13.175) 134(10.25,13.175) 135(9.75,13.175) 136(9.25,13.175) 137(8.75,13.175) 138(8.25,13.175) 139(7.75,13.175) 140(7.25,13.175) 141(6.75,13.175) 142(6.25,13.175) 143(5.75,13.175) 144(5.25,13.175) 145(4.75,13.175) 146(4.25,13.175) 147(3.75,13.175) 148(3.25,13.175) 149(2.75,13.175) 150(2.25,13.175) 151(1.75,13.175) 152(1.25,13.175) 153(0.75,13.175) 154(0.25,13.175) 155(-0.25,13.175) 156(-0.75,13.175) 157(-1.25,13.175) 158(-1.75,13.175) 159(-2.25,13.175) 160(-2.75,13.175) 161(-3.25,13.175) 162(-3.75,13.175) 163(-4.25,13.175) 164(-4.75,13.175) 165(-5.25,13.175) 166(-5.75,13.175) 167(-6.25,13.175) 168(-6.75,13.175) 169(-7.25,13.175) 170(-7.75,13.175) 171(-8.25,13.175) 172(-8.75,13.175) 173(-9.25,13.175) 174(-9.75,13.175) 175(-10.25,13.175) 176(-10.75,13.175)
  silkscreen extent -13.3,-11.6 11.6,11.6, body extent -12,-12 12,12, height 1.6
TCA6424A-QFN32 [mm] "QFN, 32-Leads, Body 5.00x5.00mm, Pitch 0.50mm, Thermal Pad 2.90x2.90mm, IPC Medium Density"
  oval 1.8x0.3 smd: 1(-37.7,36.55) 2(-37.7,36.05) 3(-37.7,35.55) 4(-37.7,35.05) 5(-37.7,34.55) 6(-37.7,34.05) 7(-37.7,33.55) 8(-37.7,33.05) 17(-31.9,33.05) 18(-31.9,33.55) 19(-31.9,34.05) 20(-31.9,34.55) 21(-31.9,35.05) 22(-31.9,35.55) 23(-31.9,36.05) 24(-31.9,36.55)
  oval 0.3x1.8 smd: 9(-36.55,31.9) 10(-36.05,31.9) 11(-35.55,31.9) 12(-35.05,31.9) 13(-34.55,31.9) 14(-34.05,31.9) 15(-33.55,31.9) 16(-33.05,31.9) 25(-33.05,37.7) 26(-33.55,37.7) 27(-34.05,37.7) 28(-34.55,37.7) 29(-35.05,37.7) 30(-35.55,37.7) 31(-36.05,37.7) 32(-36.55,37.7)
  rect 2.9x2.9 smd: 33(-34.8,34.8)
  silkscreen extent -38.3,32.07 -32.07,37.52, body extent -37.37,32.22 -32.22,37.37, height 0.6
TSOP44 [mm]
  rect 1.8x0.4 smd: 1(-0.009,0.001) 2(-0.009,-0.799) 3(-0.009,-1.599) 4(-0.009,-2.399) 5(-0.009,-3.199) 6(-0.009,-3.999) 7(-0.009,-4.799) 8(-0.009,-5.599) 9(-0.009,-6.399) 10(-0.009,-7.199) 11(-0.009,-7.999) 12(-0.009,-8.799) 13(-0.009,-9.599) 14(-0.009,-10.399) 15(-0.009,-11.199) 16(-0.009,-11.999) 17(-0.009,-12.799) 18(-0.009,-13.599) 19(-0.009,-14.399) 20(-0.009,-15.199) 21(-0.009,-15.999) 22(-0.009,-16.799) 23(11.991,-16.799) 24(11.991,-15.999) 25(11.991,-15.199) 26(11.991,-14.399) 27(11.991,-13.599) 28(11.991,-12.799) 29(11.991,-11.999) 30(11.991,-11.199) 31(11.991,-10.399) 32(11.991,-9.599) 33(11.991,-8.799) 34(11.991,-7.999) 35(11.991,-7.199) 36(11.991,-6.399) 37(11.991,-5.599) 38(11.991,-4.799) 39(11.991,-3.999) 40(11.991,-3.199) 41(11.991,-2.399) 42(11.991,-1.599) 43(11.991,-0.799) 44(11.991,0.001)
  silkscreen extent 1.83,-17.2 10.16,0.4
TSOP48 [mm]
  rect 2x0.25 smd: 1(0,0) 2(0,-0.5) 3(0,-1) 4(0,-1.5) 5(0,-2) 6(0,-2.5) 7(0,-3) 8(0,-3.5) 9(0,-4) 10(0,-4.5) 11(0,-5) 12(0,-5.5) 13(0,-6) 14(0,-6.5) 15(0,-7) 16(0,-7.5) 17(0,-8) 18(0,-8.5) 19(0,-9) 20(0,-9.5) 21(0,-10) 22(0,-10.5) 23(0,-11) 24(0,-11.5) 25(20,-11.5) 26(20,-11) 27(20,-10.5) 28(20,-10) 29(20,-9.5) 30(20,-9) 31(20,-8.5) 32(20,-8) 33(20,-7.5) 34(20,-7) 35(20,-6.5) 36(20,-6) 37(20,-5.5) 38(20,-5) 39(20,-4.5) 40(20,-4) 41(20,-3.5) 42(20,-3) 43(20,-2.5) 44(20,-2) 45(20,-1.5) 46(20,-1) 47(20,-0.5) 48(20,0)
  silkscreen extent 1.83,-11.75 18.17,0.25
TSOP54 [mm]
  rect 2x0.4 smd: 1(0,0) 2(0,-0.8) 3(0,-1.6) 4(0,-2.4) 5(0,-3.2) 6(0,-4) 7(0,-4.8) 8(0,-5.6) 9(0,-6.4) 10(0,-7.2) 11(0,-8) 12(0,-8.8) 13(0,-9.6) 14(0,-10.4) 15(0,-11.2) 16(0,-12) 17(0,-12.8) 18(0,-13.6) 19(0,-14.4) 20(0,-15.2) 21(0,-16) 22(0,-16.8) 23(0,-17.6) 24(0,-18.4) 25(0,-19.2) 26(0,-20) 27(0,-20.8) 28(12,-20.8) 29(12,-20) 30(12,-19.2) 31(12,-18.4) 32(12,-17.6) 33(12,-16.8) 34(12,-16) 35(12,-15.2) 36(12,-14.4) 37(12,-13.6) 38(12,-12.8) 39(12,-12) 40(12,-11.2) 41(12,-10.4) 42(12,-9.6) 43(12,-8.8) 44(12,-8) 45(12,-7.2) 46(12,-6.4) 47(12,-5.6) 48(12,-4.8) 49(12,-4) 50(12,-3.2) 51(12,-2.4) 52(12,-1.6) 53(12,-0.8) 54(12,0)
  silkscreen extent 1.83,-21.2 10.16,0.4
USB/SM0.8-6H5 [mm]
  rect 2.3x0.5 smd: 1(-7.85,-1.6) 2(-7.85,-0.8) 3(-7.85,0) 4(-7.85,0.8) 5(-7.85,1.6)
  rect 2.5x2 smd: 6(-7.75,4.45) 7(-1.996,4.45) 8(-7.75,-4.45) 9(-1.996,-4.45)
  round 0.6 hole 1.27 unplated: MH1(-5.25,2.2) MH2(-5.25,-2.2)
  silkscreen extent -9.67,-4.95 0.7,4.95
WSON8 [mm]
  rect 1x0.45 smd: 1(-3.975,1.905) 2(-3.975,0.635) 3(-3.975,-0.635) 4(-3.975,-1.905) 5(3.975,-1.905) 6(3.975,-0.635) 7(3.975,0.635) 8(3.975,1.905)
  rect 3.5x4.4 smd: 9(0,0)
  silkscreen extent -4.8,-3.05 4.1,3.05
XTAL1 [mil]
  round 62 hole 28: 1(0.37,0.28) 2(200.37,0.28)
  silkscreen extent -100,-60 300,60
XTAL-2 [mm]
  rect 1x2 smd: 1(0,0) 2(-0.025,-3.404) ""(5.579,-3.378) ""(5.579,0)
  silkscreen extent -1.93,-3.4 6.59,0
XTAL_US [mil]
  round 50 hole 28: 1(0,0) 2(192.13,0)
  silkscreen extent -131,-98 323,98

## Part data
1: "Connector"
C1 C2 C3 C4 C5 C6 C7 C8 C9 C10 C11 C12 C13 C14 C15 C16 C17 C18 C19 C20 C22 C23 C24 C25 C26 C27 C28 C29 C30 C31 C32 C33 C34 C35 C36 C37 C38 C39 C40 C41 C42 C43 C44 C45 C46 C47 C48 C49 C50 C51 C52 C53 C54 C55 C56 C57 C58 C59 C60 C61 C62 C64 C65 C66 C67 C68 C69 C70 C71 C72 C73 C74 C75 C78 XC1 XC2: library part C
C21: library part Cap, "Capacitor"
C63: library part ELECTRO1
D1 D2: library part D
J1: library part FPC-40, "FPC-40P-0.5mm"
P1: "Header, 25-Pin, Dual row"
P3 P100: "Header, 13-Pin"
P5: "Header, 20-Pin, Dual row"
P7: library part "Header 5", "Header, 5-Pin"
P9: "Header, 10-Pin"
P16 P20: "Header, 4-Pin"
P18 P21: "Header, 2-Pin"
P50: library part USB5
R1 R2 R3 R4 R5 R6 R7 R8 R9 R10 R11 R12 R13 R14 R15 R16 R17 R18 R19 R20 R21 R22 R34 R35 R37 R38 R39 R41 R43 R44 R45 R52 R53 R54 R65 R72 R73 R74 R75 R76 R77 R78 R79 R80 R81 R82 R83 R84 R85 R86: library part RES
R23 R24 R25 R26 R27 R28 R29 R30 R31 R32 R33 R36 R40 R42 R46 R47 R48 R49 R50 R51 R55 R56 R57 R58 R59 R60: library part R
U1: library part IS42S16160B, "32MB SDRAM"
U4 U5 U6: "Low-Voltage 24-Bit I2C and SMBus I/O Expander, 24 Outputs, 1.65 to 5.5 V, -40 to 85 degC, 32-pin UQFN (RGJ), Green (RoHS & no Sb/Br)"
U8: "W25X16;SST25VF016;MX25L1605"
U10: library part W25Q128, "W25Q128"
U11: library part MOFET_N
U12: "USB"
U15: "CAN"
U16: library part LAN8720, "ETH PHY"
U18 U19 U20: library part LT1763
U21 U23: library part LM207
U24 U25: "SAR ADC Drive"
X1: library part XTAL
Y1: "Crystal Oscillator"
Y2: library part XTAL, "Crystal Oscillator"

## Via types
v1: diameter 35, hole 20, Top Layer to Bottom Layer, 496 vias
v2: diameter 25, hole 16, Top Layer to Bottom Layer, 109 vias
v3: diameter 19.68, hole 7.87, Top Layer to Bottom Layer, 31 vias
v4: diameter 120, hole 120, Top Layer to Bottom Layer, 5 vias
v5: diameter 50, hole 28, Top Layer to Bottom Layer, 3 vias
v6: diameter 110, hole 110, Top Layer to Bottom Layer, 2 vias
v7: diameter 38, hole 28, Top Layer to Bottom Layer, 1 vias
v8: diameter 80, hole 50, Top Layer to Bottom Layer, 1 vias

## Nets (pads, with @x,y where several pads share a name; then routed paths per layer and width w, separated by ;. In a path a pad name is that pad's centre, name@x,y a point inside that pad or via, vN(x,y) a via of type N, cw(c..) or ccw(c..) an arc to the next point about the centre after c; other vN are vias at no path point)
18B20: 1.2 R34.1 U7.165 | length 2415.3
  Top Layer w8: 1.2@90,3235 165,3235 R34.1@200,3200 765,3200 v1(795,3170) ; v1(1540,3540) 1600,3480 1600,2916.32 1578.31,2894.63 U7.165@1578.31,2788.7
  Bottom Layer w8: v1(795,3170) 800,3175 1175,3175 v1(1540,3540)
+3.3V: C67.1 C68.1 C69.1 P1.27 P1.34 P1.39 U20.1 U20.2 | length 2311.9
  Top Layer w8: P1.34@1685,3730 1730,3685 1930,3685 P1.39@1985,3630 2030,3675 2030,3750 2050,3770 2120,3770 2135,3755 2135,3715 2165,3685 2210,3685 2240,3655 2240,3600 2280,3560 2290,3560 ; U20.2@3160,3175 U20.1@3160,3225
  Top Layer w25: 2290,3560 2455,3560 2840,3175 C67.1@2910,3175 C68.1@2990,3175 C69.1@3070,3175 U20.2@3160,3175
  Bottom Layer w8: P1.27@1385,3630 1395,3630 1450,3685 1640,3685 P1.34@1685,3730
+5V: R36.1
AGND: C70.2 C71.2 C72.1 C73.1 C74.1 C75.1 C78.1 L6.1 P21.2 R76.1 U21.4 U22.4 U22.8 U23.4 U24.6 U25.6 XC1.2 XC2.2 | length 1233.8
  Top Layer w8: v1(280,1105) C72.1@280,1155 365,1155 U22.8@390,1180 ; R76.1@280,1315 280,1365 v1(280,1370) ; C78.1@360,1435 360,1410 v1(390,1380) ; U25.6@391.34,1572.8 432.8,1572.8 v1(470,1610) ; U21.4@510,1045 v1(510,1105) ; U22.4@610,1330 690,1330 C70.2@715,1305 v1(715,1355) 760,1400 L6.1@760,1415 ; XC2.2@615,1435 v1(680,1435)
  Bottom Layer w8: v1(280,1105) C73.1@280,1155 C73.1@285,1150 ; v1(280,1370) C71.2@280,1315 C71.2@295,1330 ; XC1.2@360,1435 360,1410 v1(390,1380) ; U23.4@390,1330 v1@390,1370 ; U24.6@391.34,1547.2 437.2,1547.2 470,1580 v1(470,1610) ; C75.1@615,1435 v1(680,1435) ; C74.1@715,1305 v1(715,1355)
BOOT0: R26.1 U7.166 | length 219
  Top Layer w8: U7.166@1558.62,2788.7 1558.62,2923.62 v1(1560,2925)
  Bottom Layer w8: v1(1560,2925) 1570,2915 R26.1@1570,2847
BYPASS_REG: R29.1 R30.1 U7.48 | length 255.8
  Top Layer w8: v1(1420,1835) 1420.83,1834.17 U7.48@1420.83,1751.3
  Bottom Layer w8: R30.1@1380,1757 1380,1795 v1(1420,1835) 1483,1835 R29.1@1493,1845
BZ: R35.2 U7.145 U11.B | length 1477.8
  Top Layer w8: v1(1970,3385) 1974,3381 1974,2790.69 U7.145@1972.01,2788.7
  Bottom Layer w8: v1(1970,3385) 2002,3417 2587,3417 2630,3460 R35.2@2630,3565 U11.B@2630,3648
CAN1_RX: U7.167 U15.4 | length 1316.9
  Top Layer w8: v1(1495,3540) 1580,3455 1580,3030 1532.5,2982.5 1532.5,2913.61 1538.94,2907.17 U7.167@1538.94,2788.7
  Bottom Layer w8: U15.4@1130,3230 1210,3230 1495,3515 v1(1495,3540)
CAN1_TX: U7.168 U15.1 | length 1305.8
  Top Layer w8: v1(1345,3560) 1435,3560 1560,3435 1560,3035 1518.5,2993.5 1518.5,2886.5 1519.25,2885.75 U7.168@1519.25,2788.7
  Bottom Layer w8: U15.1@1130,3380 1170,3380 1206,3416 1326,3416 1360,3450 1360,3540 1345,3555 v1(1345,3560)
CANH: P1.17 R45.1 U15.7 | length 607.8
  Top Layer w8: P1.17@870,3635 v1(965,3540) v1@970,3535
  Bottom Layer w8: U15.7@910,3330 819,3330 792.4,3356.6 792.4,3397.6 819.8,3425 940,3425 R45.1@980,3465 980,3525 v1(965,3540)
CANL: P1.19 R45.2 U15.6 | length 471.6
  Top Layer w8: P1.19@985,3630 1055,3560 v1(1055,3540) v1@1055,3525
  Bottom Layer w8: U15.6@910,3280 940,3280 967.5,3307.5 967.5,3372.5 1045,3450 R45.2@1045,3465 1045,3530 v1(1055,3540)
CE_1302: U13.5
CS_1_X: U6.17
CS_1_Y: U6.18
CS_1_Z: U6.19
CSX_AC_F10: P1.9 U4.13 | length 240.3
  Bottom Layer w8: P1.9@485,3630 519.76,3595.24 U4.13@519.76,3404.09
CSX_AC_F50: P1.11 U4.14 | length 244.8
  Bottom Layer w8: U4.14@539.45,3404.09 539.45,3584.45 P1.11@585,3630
CSX_DC_F10: P1.5 U4.11 | length 359.6
  Bottom Layer w8: P1.5@285,3630 325,3590 415,3590 480.39,3524.61 U4.11@480.39,3404.09
CSX_DC_F50: P1.7 U4.12 | length 285.3
  Bottom Layer w8: P1.7@385,3630 405,3630 500.08,3534.92 U4.12@500.08,3404.09
CSX_IN_ACDC: P1.3 U4.10 | length 436.8
  Bottom Layer w8: P1.3@185,3630 246,3569 411,3569 460.71,3519.29 U4.10@460.71,3404.09
CSX_IN_S10: P1.1 U4.9 | length 514
  Bottom Layer w8: P1.1@85,3630 160,3555 400,3555 441.02,3513.98 U4.9@441.02,3404.09
CSX_OUT_ACDC: P1.13 U4.15 | length 298.5
  Bottom Layer w8: U4.15@559.13,3404.09 559.13,3539.13 650,3630 P1.13@685,3630
CSY_AC_F10: P1.10 U4.5 | length 683.2
  Top Layer w8: v1(245,3520) 285,3560 307.5,3560 308.5,3561 310.8,3561 329.8,3580 420,3580 435,3595 435,3680 P1.10@485,3730
  Bottom Layer w8: v1(245,3520) 315,3450 315,3340 355.24,3299.76 U4.5@395.75,3299.76
CSY_AC_F50: P1.12 U4.6 | length 685.9
  Top Layer w8: v1(295,3520) 341,3566 425.8,3566 444.8,3585 505,3585 535,3615 535,3680 P1.12@585,3730
  Bottom Layer w8: v1@295,3506.5 v1@295,3511.5 ; v1(295,3520) 331.43,3483.57 331.43,3343.57 355.55,3319.45 U4.6@395.75,3319.45
CSY_DC_F10: P1.6 U4.3 | length 695.6
  Top Layer w8: v1(145,3520) 235,3610 235,3680 P1.6@285,3730
  Bottom Layer w8: v1@145,3506.5 v1@145,3511.5 ; v1(145,3520) 150,3520 195,3475 250,3475 285,3440 285,3330.2 354.81,3260.39 U4.3@395.75,3260.39
CSY_DC_F50: P1.8 U4.4 | length 685.6
  Top Layer w8: v1(195,3520) 250,3575 305,3575 335,3605 335,3680 P1.8@385,3730
  Bottom Layer w8: v1(195,3520) 225,3490 255.2,3490 300,3445.2 300,3335 354.92,3280.08 U4.4@395.75,3280.08
CSY_IN_ACDC: P1.4 U4.2 | length 725.6
  Top Layer w8: v1(95,3520) 95,3555 135,3595 135,3680 P1.4@185,3730
  Bottom Layer w8: v1(95,3520) 155,3460 241,3460 271,3430 271,3324.4 354.69,3240.71 U4.2@395.75,3240.71
CSY_IN_S10: P1.2 U4.1 | length 759.7
  Top Layer w8: v1(45,3520) 45,3690 P1.2@85,3730
  Bottom Layer w8: v1(45,3520) 55,3520 127.5,3447.5 147.7,3447.5 149.2,3446 229,3446 257,3418 257,3318 353.98,3221.02 U4.1@395.75,3221.02
CSY_OUT_ACDC: P1.14 U4.7 | length 696.2
  Top Layer w8: v1(345,3520) 377,3552 431.6,3552 449.6,3570 600,3570 630,3600 630,3675 P1.14@685,3730
  Bottom Layer w8: v1(345,3520) 345.43,3519.57 345.43,3349.57 355.87,3339.13 U4.7@395.75,3339.13
CSZ_AC_F10: P1.26 U4.21 | length 979.1
  Top Layer w8: v1(740,3465) 740,3510 824.53,3594.53 824.53,3659.53 855,3690 1245,3690 P1.26@1285,3730
  Bottom Layer w8: U4.21@624.09,3280.08 670.08,3280.08 725,3335 725,3450 v1(740,3465)
CSZ_AC_F50: P1.28 U4.22 | length 1084.2
  Top Layer w8: v1(785,3485) 840,3540 840,3650 866,3676 1250.8,3676 1264.8,3690 1345,3690 P1.28@1385,3730
  Bottom Layer w8: U4.22@624.09,3260.39 670.19,3260.39 740,3330.2 740,3420 785,3465 v1(785,3485)
CSZ_DC_F10: P1.22 U4.19 | length 751
  Bottom Layer w8: U4.19@624.09,3319.45 669.45,3319.45 695,3345 695,3485 741,3531 880.8,3531 939.8,3590 1010,3590 1030,3610 1030,3675 P1.22@1085,3730
CSZ_DC_F50: P1.24 U4.20 | length 856
  Bottom Layer w8: U4.20@624.09,3299.76 627.87,3303.54 673.34,3303.54 710,3340.2 710,3480 747,3517 886.6,3517 889.6,3520 895,3520 945,3570 1009.8,3570 1044,3604.2 1044,3664 1060,3680 1135,3680 P1.24@1185,3730
CSZ_IN_ACDC: P1.20 U4.18 | length 648.8
  Bottom Layer w8: U4.18@624.09,3339.13 669.13,3339.13 680,3350 680,3490 735,3545 875,3545 935,3605 935,3680 P1.20@985,3730
CSZ_IN_S10: P1.18 U4.17 | length 537.8
  Bottom Layer w8: U4.17@624.09,3358.82 624.09,3494.09 690,3560 780,3560 840,3620 840,3695 875,3730 P1.18@885,3730
CSZ_OUT_ACDC: P1.30 U4.23 | length 1130.9
  Top Layer w8: v1(835,3485) 857.5,3507.5 1061.39,3507.5 1138.89,3585 1215,3585 1230,3600 1230,3635.4 1270.6,3676 1351,3676 1365,3690 1400.9,3690 1440.9,3730 P1.30@1485,3730
  Bottom Layer w8: U4.23@624.09,3240.71 627.87,3244.49 674.09,3244.49 760,3330.4 760,3410 v1(835,3485)
DAC1_OUT1: R72.2 U7.50 | length 1613.8
  Top Layer w8: R72.2@520,810 525,815 540,815 595,870 595,1005 575,1025 575,1100 595,1120 755,1120 825,1190 825,1275 1020,1470 v1(1110,1470) ; v2(1180,1545) 1315,1545 1370,1600 1425,1600 1460.2,1635.2 U7.50@1460.2,1751.3
  Bottom Layer w8: v1(1110,1470) 1180,1540 v2(1180,1545)
DGND: 1.3 BAT1.2 C1.2 C2.2 C3.2 C4.2 C5.2 C6.2 C7.2 C8.2 C9.2 C10.2 C11.2 C12.2 C13.2 C14.2 C15.2 C16.1 C17.1 C18.2 C19.2 C20.2 C21.1 C22.1 C23.1 C24.1 C25.1 C26.1 C27.1 C28.1 C29.1 C30.1 C31.1 C32.1 C33.1 C34.1 C35.1 C36.1 C37.1 C38.1 C39.1 C40.1 C43.2 C44.1 C45.2 C46.2 C47.2 C48.2 C49.2 C50.2 C51.2 C52.2 C53.2 C54.2 C55.2 C56.2 C57.2 C58.2 C59.2 C61.2 C62.2 C63.2 C65.2 C66.2 C68.2 C69.2 EARTHNET1.8 EARTHNET1.13 EARTHNET1.14 J1.3 J1.4 J1.5 J1.11 J1.12 J1.13 J1.20 J1.21 J1.22 J1.23 J1.29 J1.A J1.B L1.2 L2.2 L3.2 L4.2 L6.2 L7.2 P1.37 P1.44 P1.49 P3.3 P3.6 P5.4 P5.17 P5.37 P7.3 P9.8 P9.9 P9.10 P16.1 P18.1 P50.5 P100.6 R9.2 R24.2 R26.2 R30.2 R32.2 R35.1 R51.1 R55.1 R56.1 R57.1 R58.2 R59.2 RST2.2 U1.6 U1.12 U1.28 U1.41 U1.46 U1.52 U1.54 U2.34 U3.13 U3.36 U4.25 U5.25 U6.25 U7.14 U7.22 U7.37 U7.61 U7.71 U7.90 U7.102 U7.113 U7.126 U7.135 U7.148 U7.158 U8.4 U10.4 U11.E U12.2 U13.4 U14.15 U15.2 U15.5 U15.8 U16.25 U17.2 U17.3 U17.4 U18.3 U18.6 U18.7 U19.3 U19.6 U19.7 U20.3 U20.6 U20.7 | length 16531.1
  Top Layer w8: v1(60,410) 65,405 180,405 225,450 L1.2@225,470 L2.2@225,555 L3.2@225,635 L4.2@225,715 ; C56.2@84.94,2792.5 C56.2@87.5,2789.94 ; R58.2@87.5,2725.06 C56.2@87.5,2789.94 ; 1.3@90,3335 RST2.2@352.91,3335 ; v1@160,2010 v1(162,2012) ; v1(225,2765) 202.5,2787.5 C57.2@184.94,2787.5 89.94,2787.5 C56.2@87.5,2789.94 ; C55.2@274.94,2527.5 274.94,2480.06 v1(275,2480) ; C53.2@400,2985 C53.2@400,3002.44 ; C53.2@400,3000 410,3000 425,3015 515,3015 530.06,2999.94 C51.2@530.06,2952.5 C52.2@590.06,2952.5 592.56,2955 700,2955 v1(805,2850) 805,2855 807.5,2852.5 C59.2@875.06,2852.5 ; R59.2@579.94,2527.5 579.94,2480.06 v1(580,2480) ; v1(800,2570) 812.5,2557.5 C58.2@874.94,2557.5 ; L6.2@850,1415 v1(850,1500) ; v1(1165,2460) 1185,2460 1207.68,2437.32 U7.14@1266.3,2437.32 ; U1.28@1166.1,487.56 1166.1,428.9 1211,384 1425.8,384 1504.8,305 1690,305 v1(1695,310) ; U7.37@1266.3,1984.57 1354.57,1984.57 v1(1355,1985) ; U7.22@1266.3,2279.84 1339.84,2279.84 1355,2295 v1(1365,2295) ; U1.41@1575.55,487.56 1575.55,420.55 v1(1575,420) 1582.5,412.5 C7.2@1582.5,365.06 ; U1.12@1638.54,960 1638.54,1006.46 1617.5,1027.5 1617.5,1092.5 1635,1110 1567.56,1110 C9.2@1555.06,1122.5 C5.2@1650.06,1122.5 1805,1122.5 v1(1825,1102.5) ; U7.61@1676.73,1751.3 1676.73,1819.38 1667.5,1828.61 1667.5,1862.5 1680,1875 1710,1875 v1(1745,1840) ; v1(1705,380) 1705,410 1733.03,438.03 U1.46@1733.03,487.56 ; v1(1715,2700) 1716.1,2701.1 U7.158@1716.1,2788.7 ; U1.6@1827.52,960 1827.52,1032.48 v1(1825,1035) v1@1830,1040 ; v1(1840,1845) 1873.58,1811.42 U7.71@1873.58,1751.3 ; v1(1910,2700) 1910,2695 1912.95,2697.95 U7.148@1912.95,2788.7 ; v1(1920,1110) 1922.5,1112.5 C3.2@1960.06,1112.5 ; U1.52@1922.01,487.56 1922.01,537.99 1905,555 1905,595 1920,610 1955,610 v1(1985,580) U1.54@1985,487.56 ; C14.2@2084.94,1432.5 2107.5,1432.5 2145,1470 v1(2145,1510) ; C2.2@2105.06,922.5 C1.2@2165.06,922.5 ; v1(2160,2700) 2170,2700 2168.86,2701.14 U7.135@2168.86,2788.7 ; C4.2@2162.5,984.94 2165.06,982.37 C1.2@2165.06,922.5 ; v1@2175,2180 v1(2175,2185) ; v1(2215,870) 2215,885 2177.5,922.5 C1.2@2165.06,922.5 ; U7.90@2303.7,1866.46 2411.46,1866.46 v1@2420,1875 ; U7.102@2303.7,2102.68 2393.13,2102.68 v1(2405,2114.55) ; U7.113@2303.7,2319.21 2439.21,2319.21 2455,2335 v1(2455,2330) ; v1(2415,1875) v1@2420,1875 ; v1(2415,3115) BAT1.2@2415,3255 ; v1(2595,435) 2595,405 2613.78,386.22 U3.36@2613.78,277.6 ; U3.13@2613.78,1065 2613.78,1133.78 2640,1160 v1(2660,1160) ; C61.2@2985,3325 C62.2@3065,3325 3090,3350 U18.3@3160,3350 v7(3250,3350) ; C68.2@2990,3110 C69.2@3070,3110 3085,3125 U20.3@3160,3125 v5(3240,3125) ; U12.2@3253.39,2715 3235,2715 3220,2730 3220,2765 3252.99,2797.99 P50.5@3460.94,2797.99 3517.01,2797.99 3540,2775 3540,2675 3505,2640 3390,2640 ; v1(3270,2635) 3275,2635 3295,2655 3375,2655 3390,2640 ; C38.1@3335,2545 3360,2545 3390,2575 3390,2640 ; U20.6@3380,3125 U20.7@3380,3175 3435,3175 3480,3220 v1(3480,3240) ; U18.7@3380,3400 U18.6@3380,3350 3450,3350 ; v1@3415,2215 3415.94,2215.94 J1.4@3489,2215.94 ; v1(3450,3400) 3450,3350 ; J1.29@3489,1723.82 3543.82,1723.82 v1(3545,1725) ; J1.23@3489,1841.93 J1.22@3489,1861.61 3413.39,1861.61 v1(3400,1875) 3406.3,1881.3 J1.21@3489,1881.3 J1.20@3489,1900.98 ; J1.13@3489,2038.78 3446.22,2038.78 v1@3426.54,2058.46 ; J1.12@3489,2058.46 v1@3426.54,2058.46 ; J1.11@3489,2078.15 3443.15,2078.15 v1(3425,2060) v1@3426.54,2058.46 ; J1.5@3489,2196.26 J1.4@3489,2215.94 ; J1.3@3489,2235.63 J1.4@3489,2215.94 ; v1(3490,1115) 3468.5,1093.5 P9.8@3405.5,1093.5 P9.9@3405.5,1133.5 P9.10@3405.5,1172.5 ; v1(3490,1175) 3495,1175 3492.5,1172.5 P9.10@3405.5,1172.5 ; v1(3500,2425) 3561.42,2363.58 J1.A@3593.43,2363.58 ; C63.2@3545,3375 3520,3350 3450,3350 ; J1.B@3590,1416.28 J1.B@3593.43,1419.7 3504.7,1419.7 v1(3485,1400) 3405.5,1320.5 P9.10@3405.5,1172.5 ; v1(3690,3010) L7.2@3690,3125 ; v1@2420,1875 2425,1880 2430,1875 v1@2420,1875
  Top Layer w10: v1(830,3380) 830,3340 840,3330 U17.2@910,3330 ; v1(835,3230) U17.4@910,3230 U17.3@910,3280 ; v1(1295,3480) 1290,3480 C50.2@1355,3480 ; U7.126@2303.7,2575.12 2429.88,2575.12 v1(2440,2565)
  Top Layer w25: R24.2@2690.06,2952.5 2732.5,2952.5 v1(2735,2955) ; C39.1@3090,410 C40.1@3170,410 3150,390 3150,335 ; v1(3150,210) 3150,335 ; C43.2@3410,410 3410,380 3380,350 3165,350 3150,335
  Bottom Layer w8: v1(162,2012) R51.1@162,2055 ; R57.1@162,2120 162,2162 v1(165,2165) ; C45.2@182.5,2824.94 182.5,2807.5 v1(225,2765) ; R56.1@222,2055 R56.1@225,2052 263,2052 265,2050 v1(270,2050) ; R55.1@222,2120 R55.1@225,2123 272,2123 275,2120 v1(270,2120) ; C46.2@417.5,2194.94 C47.2@417.5,2124.94 C48.2@417.5,2064.94 C49.2@417.5,2004.94 477.44,1945 v1(490,1945) ; C54.2@579.94,2527.5 580,2527.44 v1(580,2480) ; U6.25@634.25,643.82 634.25,709.25 v1(655,730) ; v1(820,710) 845.75,684.25 U5.25@881.18,684.25 ; R9.2@850,1015 v1(850,1080) ; v1(1165,2460) 1240,2460 C35.1@1295,2405 ; v1(1195,860) 1195.06,860.06 C6.2@1195.06,922.5 ; C34.1@1285,2270 1340,2270 v1(1365,2295) 1377.5,2282.5 C20.2@1377.5,2220.72 ; C18.2@1292.5,2170.06 C19.2@1292.5,2110.06 1292.5,2092.5 1345,2040 1355,2040 v1(1355,2025) ; C16.1@1302,1915 C17.1@1302,1975 1312,1985 v1(1355,1985) 1402.44,1985 ; C33.1@1430,1705 1382.56,1705 R30.2@1380.06,1702.5 1347.5,1702.5 1335,1715 1335,1848.89 1395,1908.89 1395,1977.56 1402.44,1985 ; C13.2@1457.5,2025.06 C13.2@1457.5,2040.06 1402.44,1985 ; v1(1550,860) 1560.06,870.06 U2.34@1637.91,870.06 ; v1(1560,2650) 1565,2655 1562.5,2657.5 R32.2@1562.5,2695.06 1562.5,2784.94 R26.2@1570.06,2792.5 ; C30.1@1695,2770 1695,2720 v1(1715,2700) ; C32.1@1700,1730 1715,1730 1745,1760 v1(1745,1840) ; v1(1735,2025) 1735,2055 1800,2120 1800,2168.5 U10.4@1821.5,2190 ; v1(1825,1102.5) v1(1825,1035) v1@1835,1045 ; v1(1840,1845) 1840,1770 1870,1740 C31.1@1885,1740 ; C36.1@1905,2765 1905,2705 v1(1910,2700) ; C8.2@1942.5,415.06 1984.94,415.06 v1(1990,410) ; C22.1@2115,1695 2270,1695 v1(2295,1720) ; C28.1@2115,2760 C27.1@2160,2760 v1(2160,2700) ; U13.4@2125,2145 v1@2170,2190 ; v1(2175,2185) 2185,2195 v1@2175,2195 ; v1(2190,2640) 2190,2630 2193.39,2633.39 2285,2633.39 2313.39,2605 C26.1@2315,2605 2400,2605 v1(2440,2565) ; C24.1@2320,2115 2320.45,2114.55 v1(2405,2114.55) ; C29.1@2325,2300 C25.1@2325,2345 2340,2330 v1(2455,2330) ; C23.1@2375,1925 2415,1885 v1(2415,1875) ; P1.49@2485,3630 2490,3630 2583,3723 U11.E@2630,3723 ; C11.2@2614.94,1102.5 C12.2@2674.94,1102.5 2674.94,1145.06 v1(2660,1160) ; R35.1@2695,3565 2695,3520 v1@2700,3515 ; v5(2985,3250) 2985,3260 C65.2@2985,3325 C66.2@3065,3325 ; U19.3@3160,3400 3200,3400 v7(3250,3350) ; P100.6@3175,2693.23 3221.77,2693.23 3270,2645 v1(3270,2635) ; v1(3425,2215) 3427.5,2212.5 C10.2@3427.5,2156.83 ; v1(3450,3400) U19.6@3380,3400 U19.7@3380,3350 3455,3350 3480,3325 v1(3480,3240)
  Bottom Layer w10: U4.25@578.82,3175.75 679.25,3175.75 v1(710,3145) ; v1(830,3380) U15.8@910,3380 ; v1(835,3230) U15.5@910,3230 ; v1(1010,3265) 1010,3335 1011.5,3336.5 1011.5,3352.71 1078.79,3420 1155,3420 C44.1@1200,3465 ; U15.2@1130,3330 v1(1225,3330) ; C21.1@1582,2425 v1(1625,2425) 1665,2425 C37.1@1685,2445 ; v1(1755,1915) 1755.06,1914.94 U8.4@1830,1914.94 ; C15.2@2331.2,2558.8 C15.2@2331.2,2555.5 2340.7,2565 v1(2440,2565)
  Bottom Layer w25: v1(3150,210) U14.15@3150,280
  other v1: 2695,3510
  other v3: 413.35,2698.35 456.65,2698.35 413.35,2741.65 456.65,2741.65
ETH_MDC: U7.33 U16.13 | length 1648.1
  Top Layer w8: U16.13@335,2770.79 v1(335,2830) ; v1(800,2065) 801.69,2063.31 U7.33@1266.3,2063.31
  Bottom Layer w8: v1(335,2830) 365,2800 610,2800 675,2735 675,2615 825,2465 825,2305 800,2280 v1(800,2065)
ETH_MDIO: R46.2 U7.42 | length 2115
  Top Layer w8: v1(205,2450) 215,2440 215,2245 300,2160 300,2035 504,1831 840.8,1831 895.94,1886.14 U7.42@1266.3,1886.14 ; R46.2@282.5,2955.06 305,2932.56 305,2895 v1(303.71,2896.29)
  Bottom Layer w8: v1(205,2450) 185,2470 185,2573.69 202.81,2591.5 221.5,2591.5 279.5,2649.5 279.5,2869.5 305,2895 v1(303.71,2896.29)